# Altium PCB picr22-team-GibiBot-mainboard.PcbDoc
Units mm, origin at the board's own origin, x right, y up, seen from the top; angles counter-clockwise.
Board outline 50 x 48 mm, 4 copper layers (Top Layer, Layer 1, Layer 2, Bottom Layer), stack 0.603 mm thick; 65 components, 54 nets, 276 pads, 131 vias.
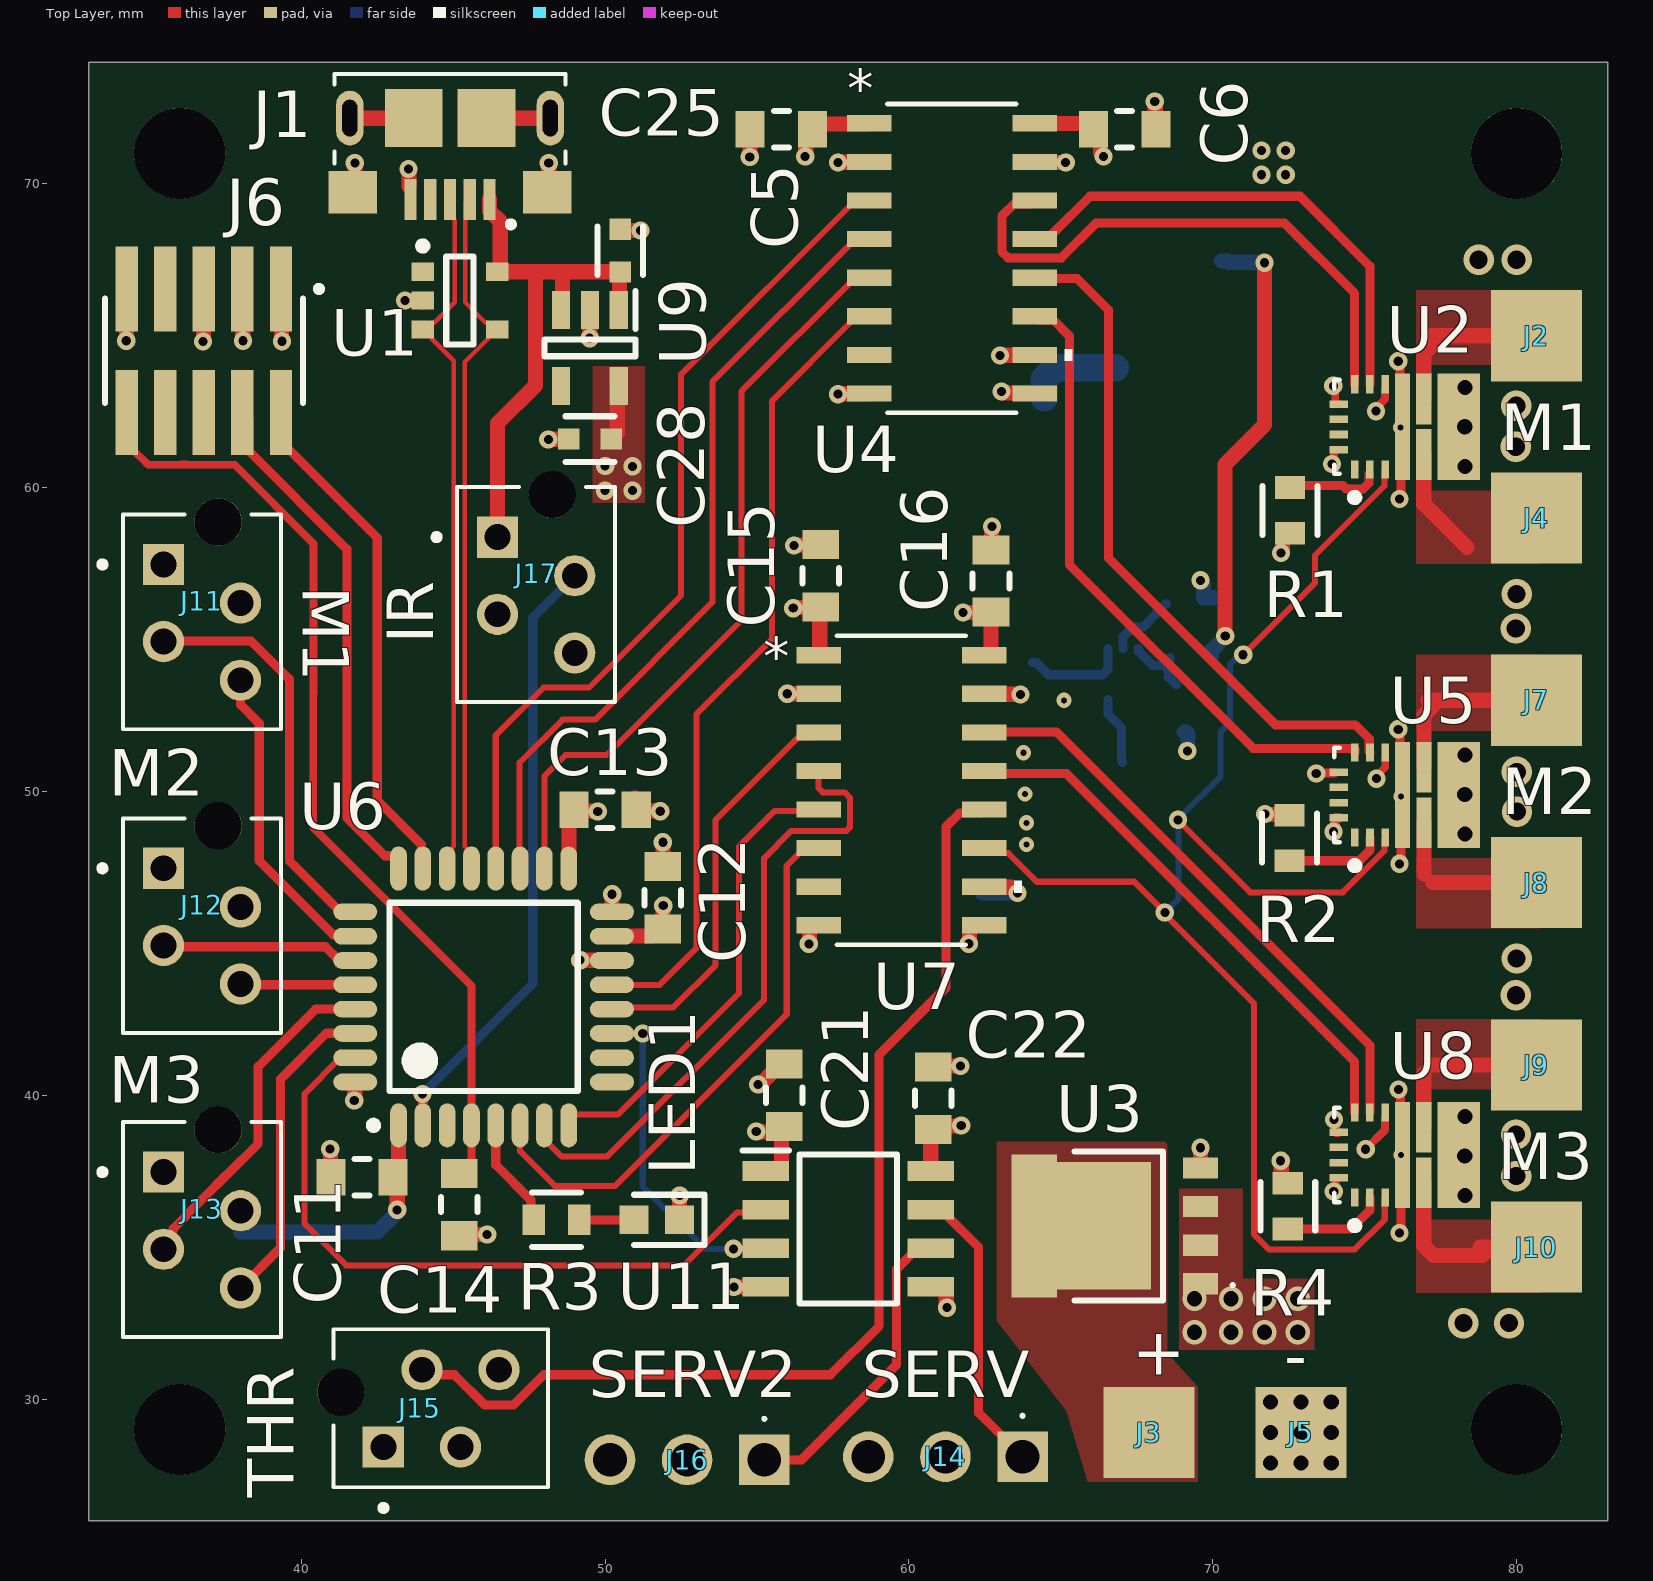
[diagram p0: Top Layer view]
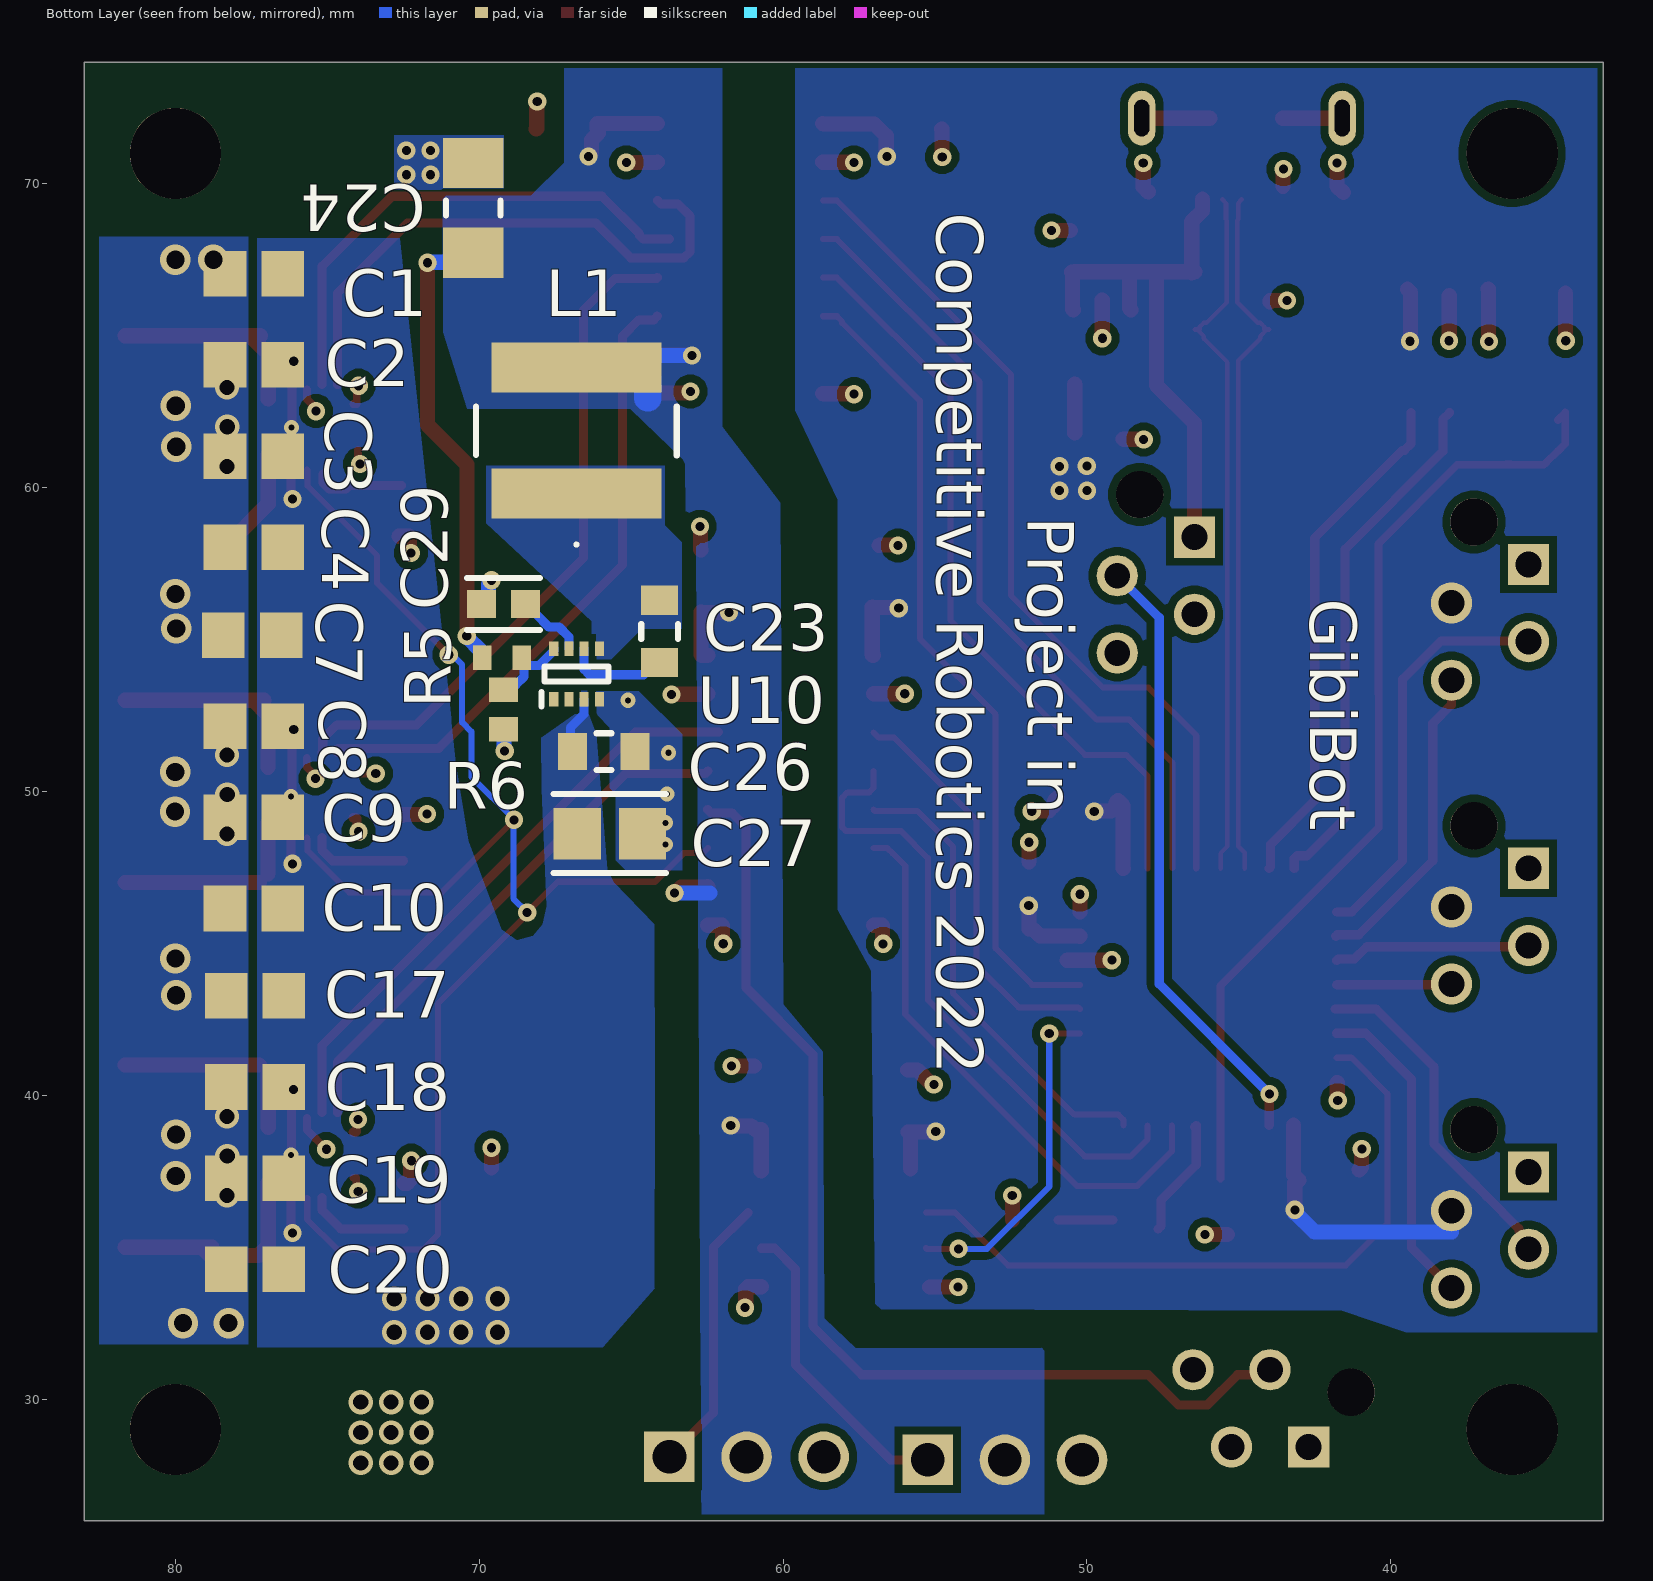
[diagram p1: Bottom Layer view, seen from below]
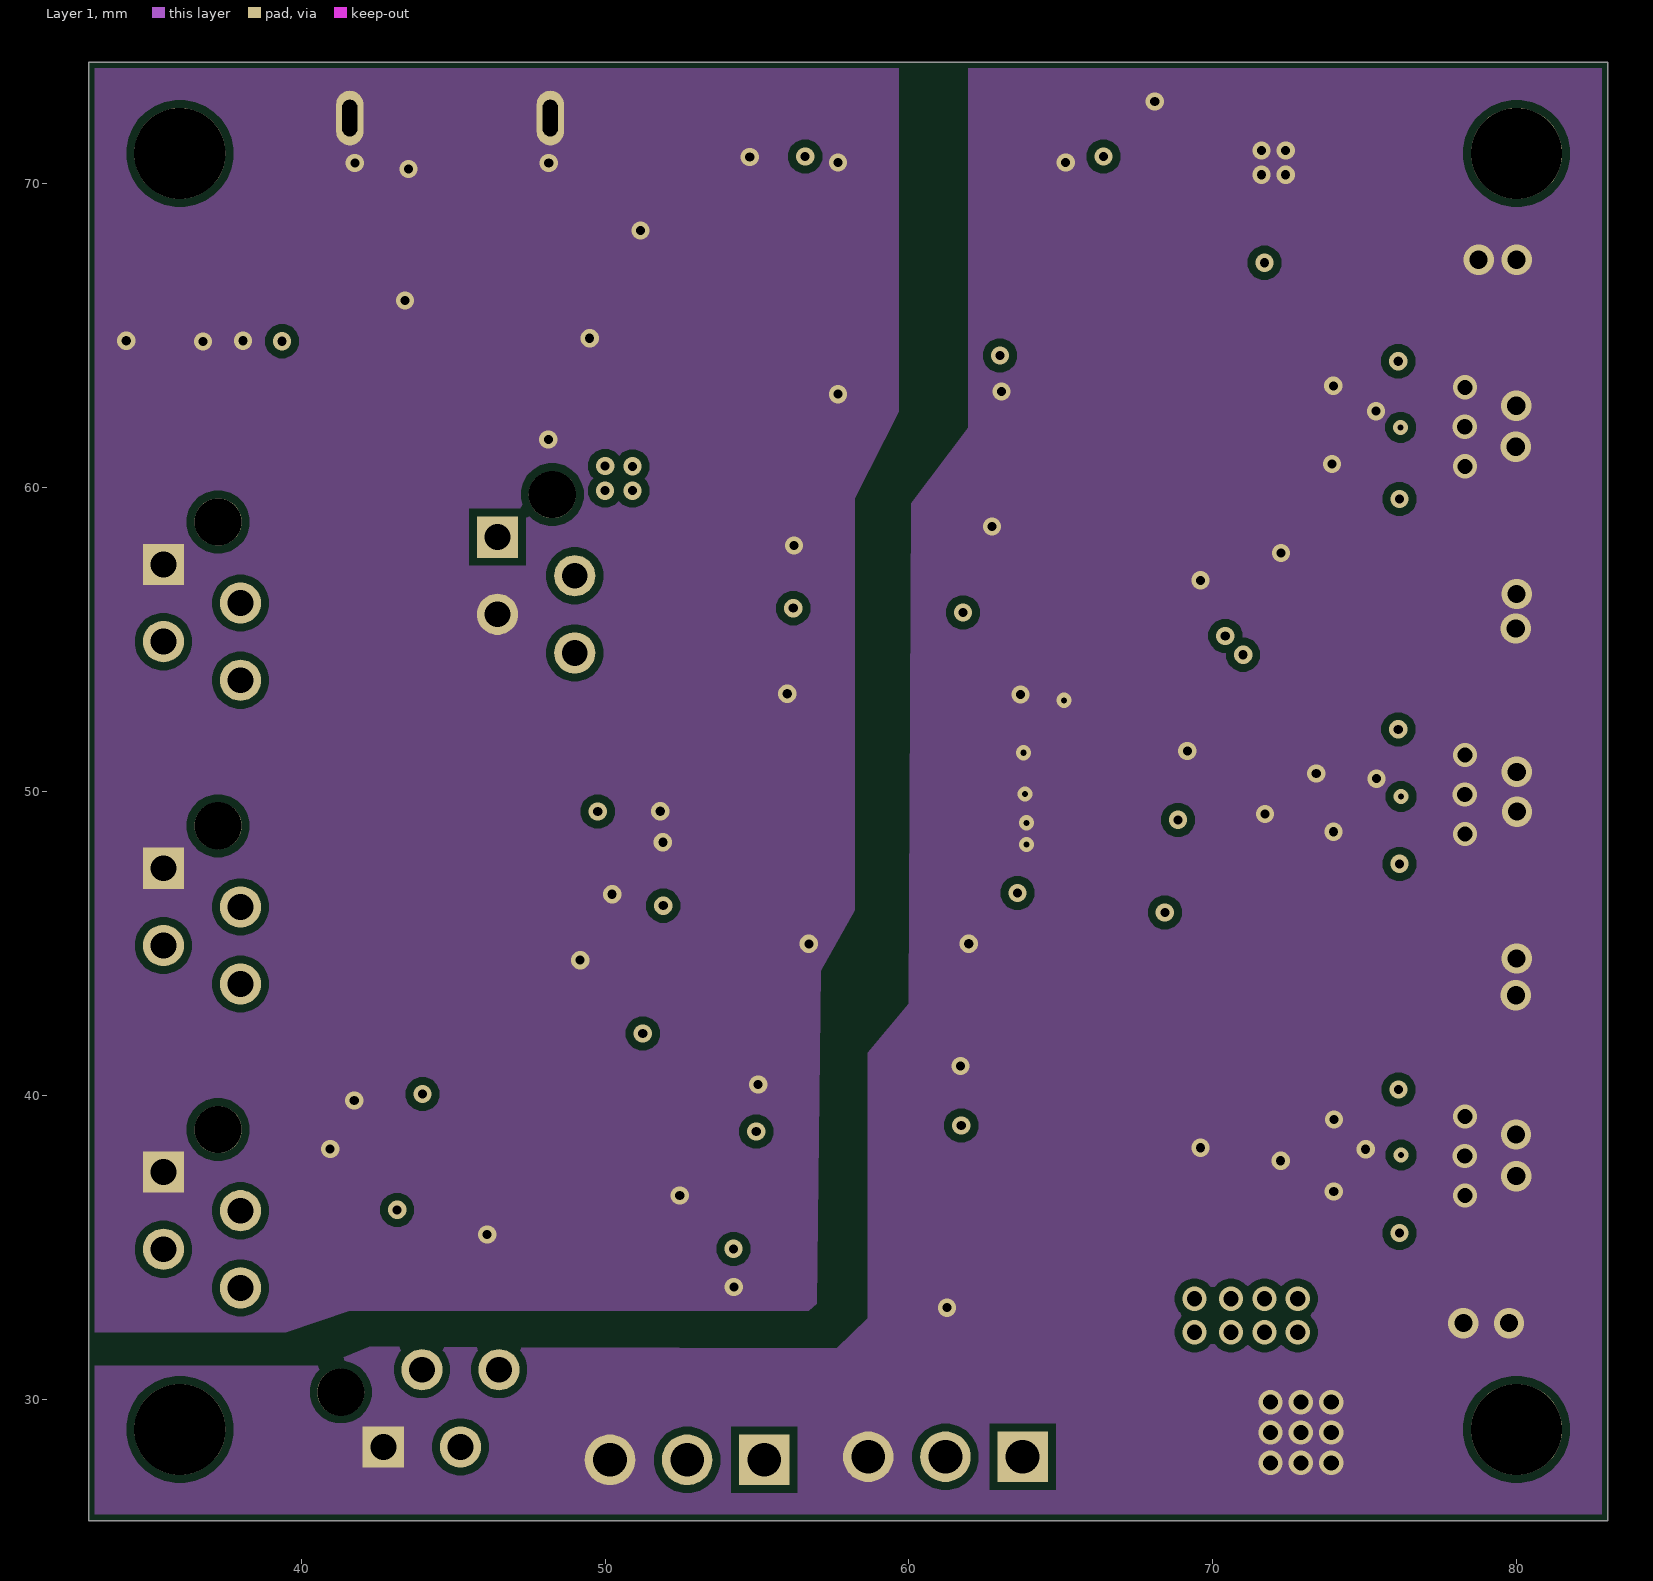
[diagram p2: Layer 1]
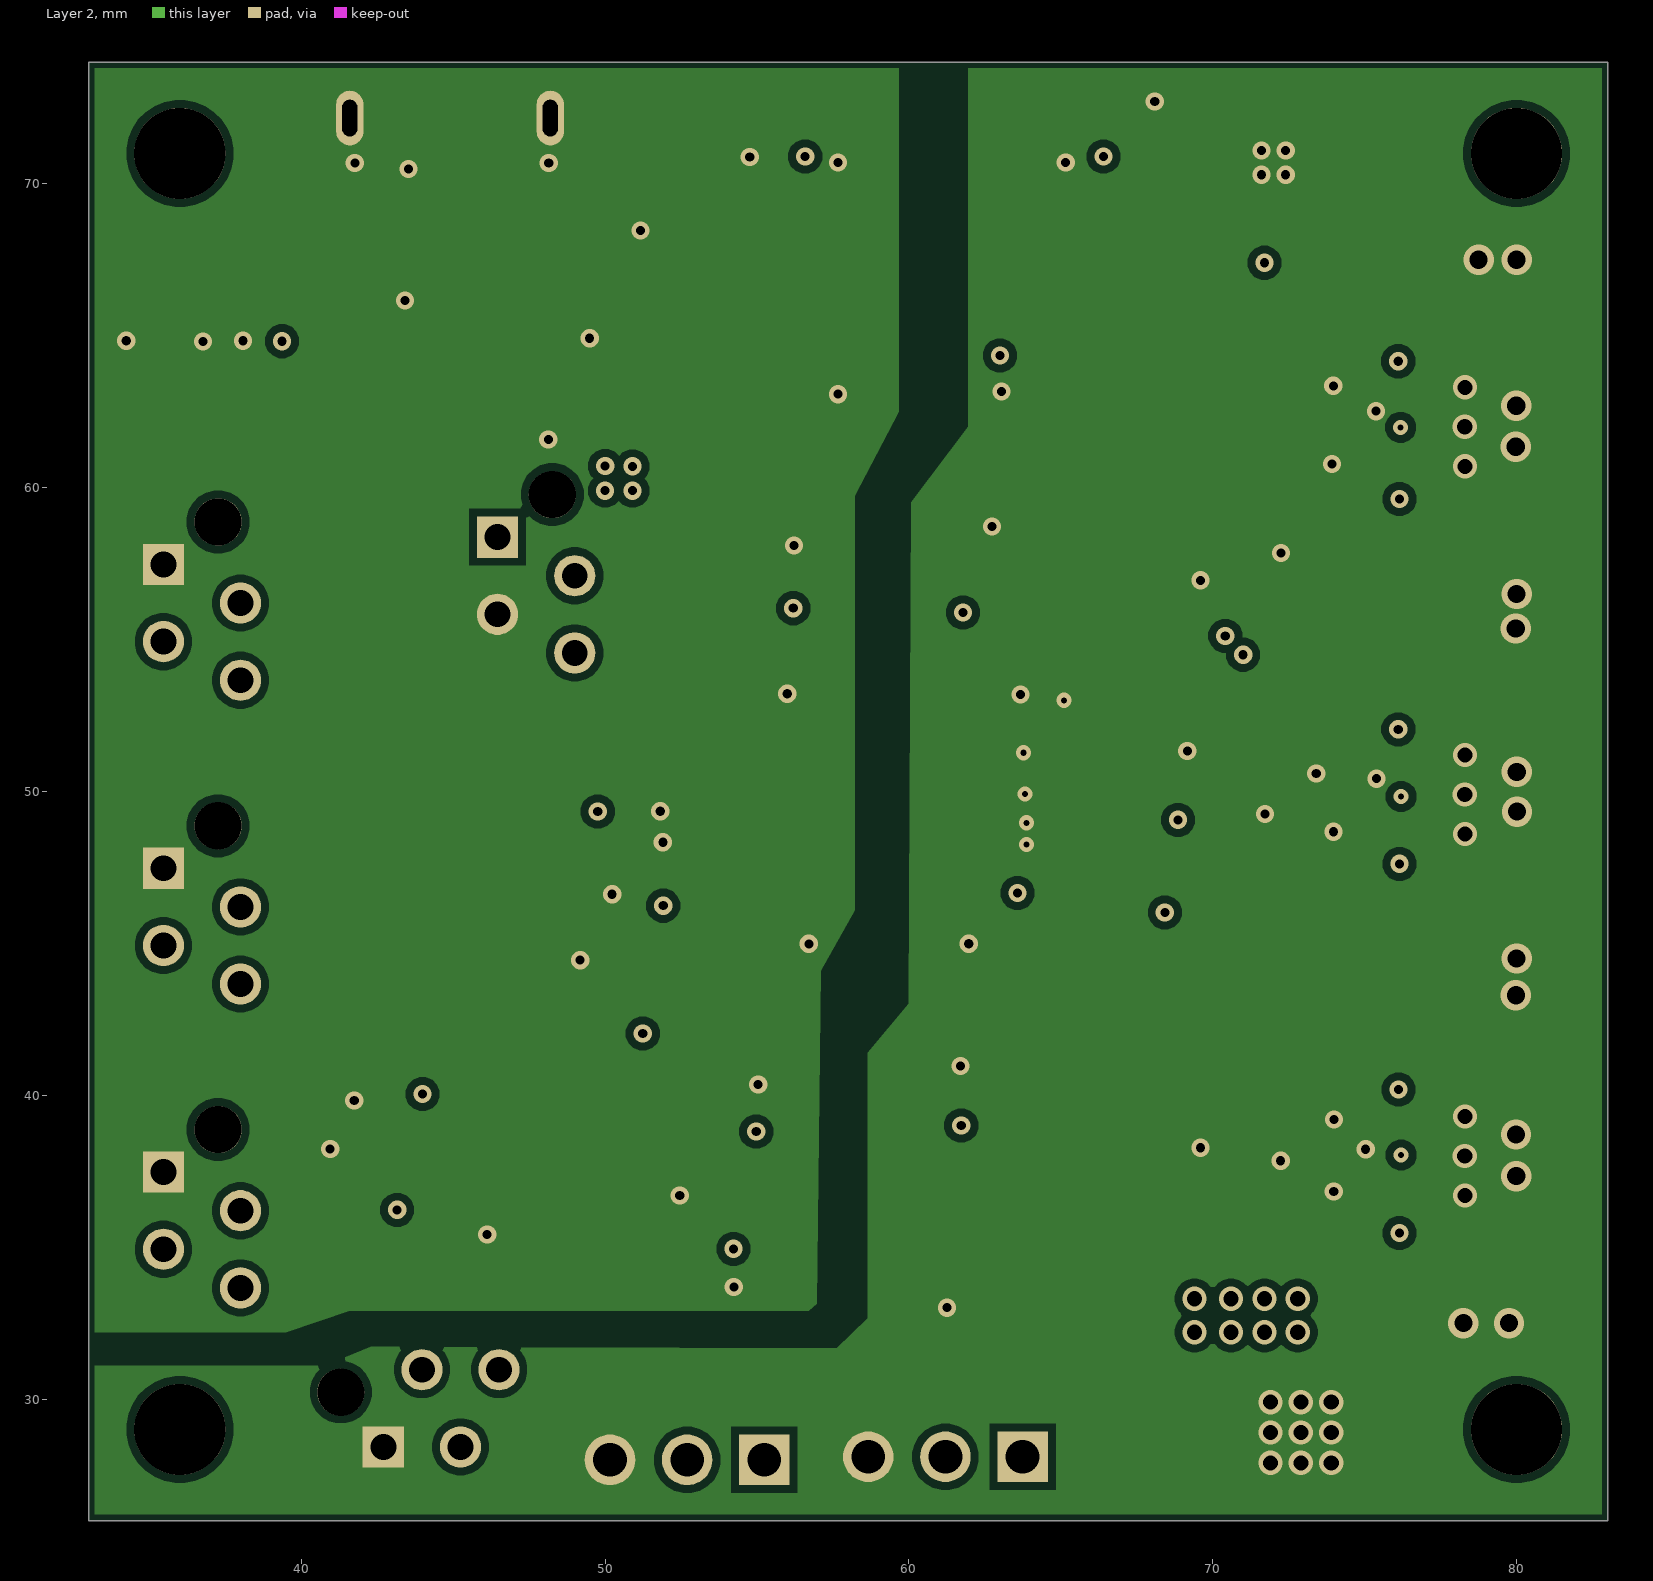
[diagram p3: Layer 2]
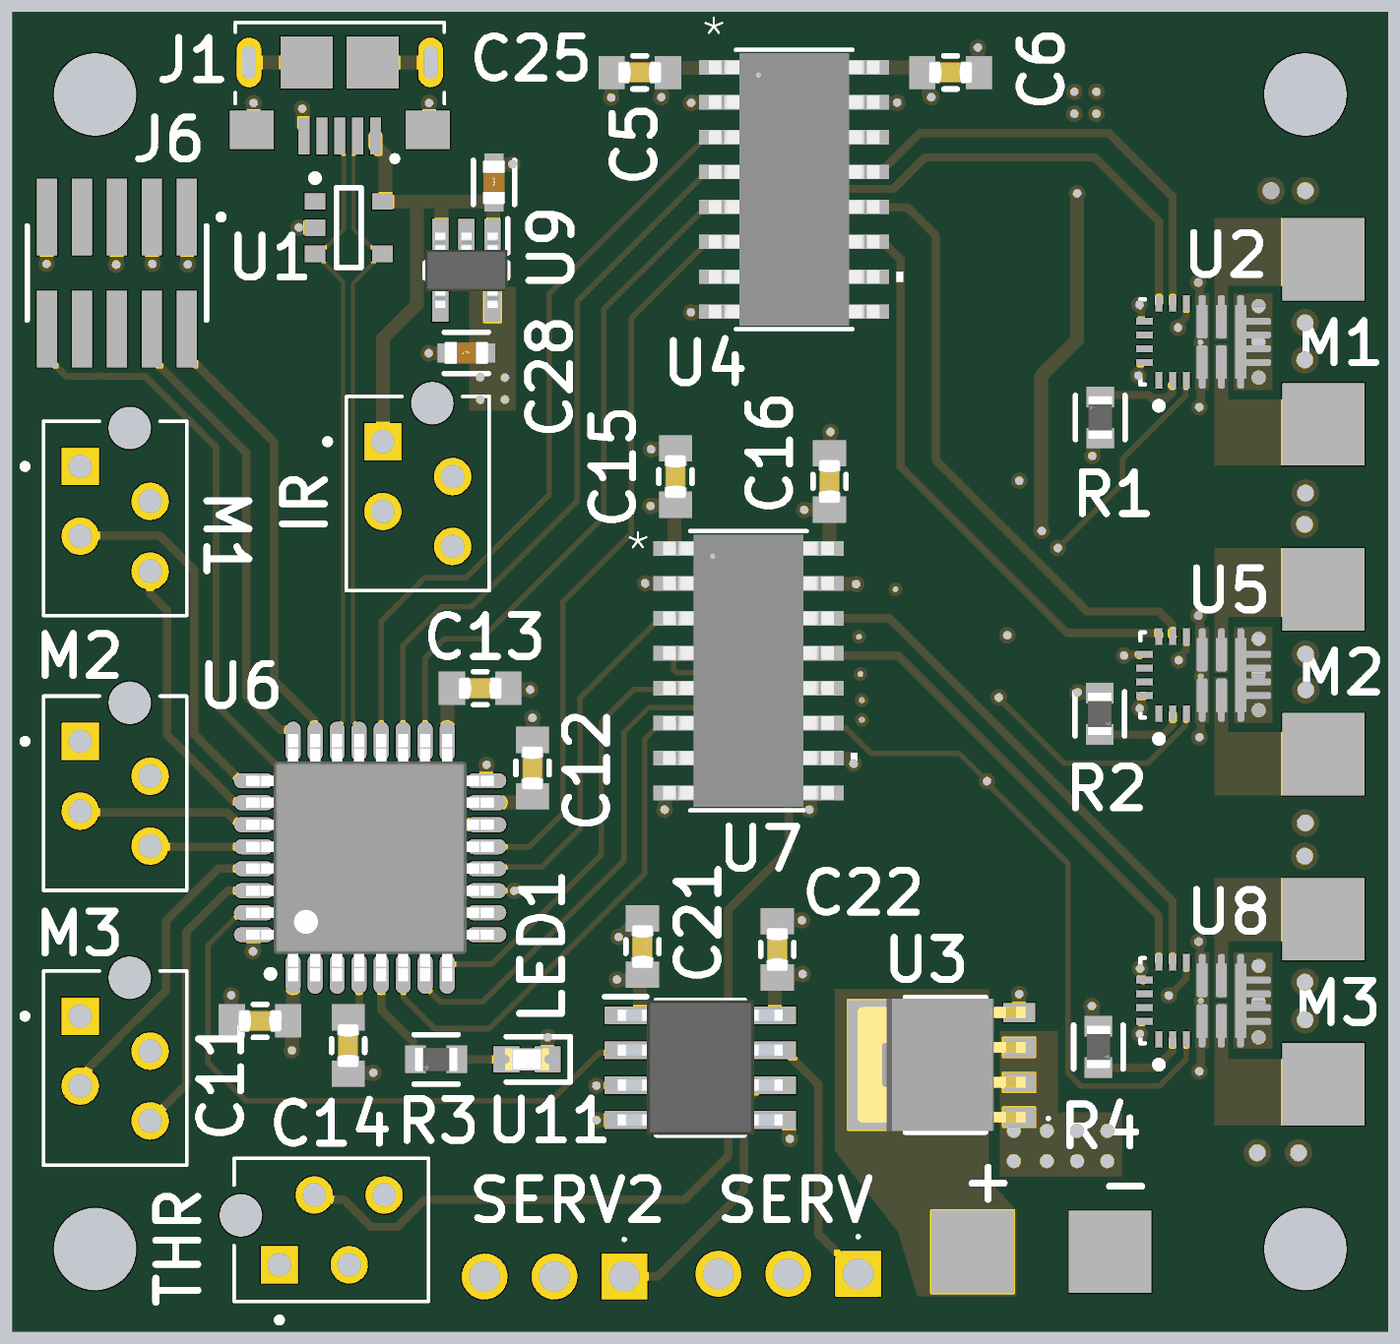
[diagram p4: 3D render of the assembled board from above, using the file's embedded part models]

## Layer stack, top to bottom
Top Solder: solder mask 0.0102, Solder Resist, Dk 3.5
Top Layer: signal copper 0.0356
Dielectric 2: prepreg 0.0711, PP-006, Dk 4.1
Layer 1: signal copper 0.035
Dielectric 1: dielectric 0.32, FR-4, Dk 4.8
Layer 2: signal copper 0.035
Dielectric 3: prepreg 0.0711, PP-006, Dk 4.1
Bottom Layer: signal copper 0.0356
Bottom Solder: solder mask 0.0102, Solder Resist, Dk 3.5

## Board outline
33,26 83,26 83,74 33,74

## Design rules (kind name [scope] priority, off if disabled: settings)
BoardOutlineClearance [All] p1: gap=0.2 ignorepadtopadclearanceinfootprint=FALSE except(0: Arc-SplitContinuation Track-SplitContinuation SMDPad-SplitContinuation THPad-SplitContinuation Via-SplitContinuation Fill-SplitContinuation Poly-SplitContinuation Region-SplitContinuation Text-SplitContinuation)
Clearance [All] p1: gap=0.254 ignorepadtopadclearanceinfootprint=TRUE except(0: Arc-Hole Track-Hole SMDPad-Hole THPad-Hole Via-Hole Fill-Hole Poly-Hole Region-Hole Text-Hole; 0.1: Arc-Arc Arc-Track Track-Track; 0.127: SMDPad-SMDPad; 0.2: Arc-SMDPad Track-SMDPad; 0.33: Arc-THPad Track-THPad)
DiffPairsRouting DiffPairsRoutingUSB [InDifferentialPairClass('USB')] p1: maxlimit=0.2 minlimit=0.2 mostfreqgap=0.2 toplayer_minwidth=0.15 toplayer_maxwidth=0.15 toplayer_prefwidth=0.15 midlayer1_minwidth=0.15 midlayer1_maxwidth=0.15 midlayer1_prefwidth=0.15 midlayer2_minwidth=0.15 midlayer2_maxwidth=0.15 midlayer2_prefwidth=0.15 bottomlayer_minwidth=0.15 bottomlayer_maxwidth=0.15 bottomlayer_prefwidth=0.15 maxuncoupledlength=12.7
HoleSize [All] p1: absolutevalues=TRUE maxlimit=6.3 minlimit=0.2 maxpercent=80.000 minpercent=20.000
HoleToHoleClearance [All] p1: gap=0.5 allowstackedmicrovias=TRUE
MinimumSolderMaskSliver [All] p1: minsoldermaskwidth=0.1
PolygonConnect [All] p1: connectstyle=Direct reliefconductorwidth=0.254 reliefentries=4 polygonreliefangle="90 Angle" airgapwidth=0.254
RoomDefinition picr22-team-GibiBot-mainboard [InComponentClass('picr22-team-GibiBot-mainboard')] p1: confinementstyle=ConfineIn formatcopy=TRUE lockcomponents=FALSE outline 32.1,24.8 84.4,24.8 84.4,75.3 32.1,75.3
RoutingVias [All] p1: holewidth=0.711 width=1.27 viastyle="Through Hole" minholewidth=0.2 minwidth=0.45 maxholewidth=0.711 maxwidth=1.27
SilkToSolderMaskClearance [IsPad] p1: minsilkscreentomaskgap=0.15 clearancetoexposedcopper=TRUE
SolderMaskExpansion [All] p1: expansion=0.05 istentingtop=FALSE
Width [All] p1: maxlimit=0.9 minlimit=0.15 preferedwidth=0.3
25 further rules are at their usual default settings.

## Classes and differential pairs
differential pair class USB: USB_D
differential pair USB_D: +USB_D_P -USB_D_N

## Components (designator, comment, footprint, x,y, rotation, side; value= is the part's Value field where it differs from the comment)
C1 "GRM21BR61A106KE19L" MURA-0805_H_1.35_M 77.419,67.038 r180 bottom
C2 "GRM21BR61A106KE19L" MURA-0805_H_1.35_M 77.419,64.038 r180 bottom
C3 "GRM21BR61A106KE19L" MURA-0805_H_1.35_M 77.419,61.038 r180 bottom
C4 "GRM21BR61A106KE19L" MURA-0805_H_1.35_M 77.419,58.038 r180 bottom
C5 "CGA3E2X7R1H104K080AA" FP-CGA3E-0_3-0_1-IPC_A 55.8,71.8 r180 top
C6 "CGA3E2X7R1H104K080AA" FP-CGA3E-0_3-0_1-IPC_A 67.1,71.8 r0 top
C7 "GRM21BR61A106KE19L" MURA-0805_H_1.35_M 77.469,55.147 r180 bottom
C8 "GRM21BR61A106KE19L" MURA-0805_H_1.35_M 77.419,52.147 r180 bottom
C9 "GRM21BR61A106KE19L" MURA-0805_H_1.35_M 77.419,49.147 r180 bottom
C10 "GRM21BR61A106KE19L" MURA-0805_H_1.35_M 77.419,46.147 r180 bottom
C11 "CGA3E2X7R1H104K080AA" FP-CGA3E-0_3-0_1-IPC_A 42,37.3 r0 top
C12 "CGA3E2X7R1H104K080AA" FP-CGA3E-0_3-0_1-IPC_A 51.9,46.5 r270 top
C13 "CGA3E2X7R1H104K080AA" FP-CGA3E-0_3-0_1-IPC_A 50,49.4 r180 top
C14 "CGA3E2X7R1H104K080AA" FP-CGA3E-0_3-0_1-IPC_A 45.2,36.4 r270 top
C15 "CGA3E2X7R1H104K080AA" FP-CGA3E-0_3-0_1-IPC_A 57.1,57.1 r90 top
C16 "CGA3E2X7R1H104K080AA" FP-CGA3E-0_3-0_1-IPC_A 62.7,56.925 r90 top
C17 "GRM21BR61A106KE19L" MURA-0805_H_1.35_M 77.385,43.271 r180 bottom
C18 "GRM21BR61A106KE19L" MURA-0805_H_1.35_M 77.385,40.271 r180 bottom
C19 "GRM21BR61A106KE19L" MURA-0805_H_1.35_M 77.385,37.271 r180 bottom
C20 "GRM21BR61A106KE19L" MURA-0805_H_1.35_M 77.385,34.271 r180 bottom
C21 "CGA3E2X7R1H104K080AA" FP-CGA3E-0_3-0_1-IPC_A 55.9,40 r270 top
C22 "CGA3E2X7R1H104K080AA" FP-CGA3E-0_3-0_1-IPC_A 60.8,39.9 r90 top
C23 "CGA3E2X7R1H104K080AA" FP-CGA3E-0_3-0_1-IPC_A 64.065,55.268 r270 bottom
C24 "GRM31CR60J107ME39L" CAPC3216X190X55ML30T25 70.2,69.205 r270 bottom
C25 "C1608X5R1C105K080AA" FP-C1608-080-0_1-MFG 50.5,67.8 r270 top
C26 "CGA3E2X7R1H104K080AA" FP-CGA3E-0_3-0_1-IPC_A 65.9,51.312 r180 bottom
C27 "C3216X7R1V106M160AC" FP-C3216-160-0_2-IPC_C 65.7,48.609 r180 bottom
C28 "C1608X5R1C105K080AA" FP-C1608-080-0_1-MFG 49.5,61.6 r0 top
C29 "CL10B333KB8NNNC" FP-CL10-IPC_B 69.2,56.172 r0 bottom
J1 "10118193-0001LF" FCI_10118193-0001LF 44.896,72.165 r180 top
J2 "M1_OUT1" "Power pad"#1 80.656,65 r90 top
J3 "BAT+" "Power pad"#2 66.9,28.9 r180 top locked
J4 "M1_OUT2" "Power pad"#1 80.656,59 r90 top
J5 "BAT-" "Power pad"#2 71.9,28.9 r180 top
J6 "FTSH-105-XX-X-DV" SAMTEC_FTSH-105-XX-X-DV 36.791,64.505 r180 top
J7 "M2_OUT1" "Power pad"#1 80.656,53 r90 top
J8 "M2_OUT2" "Power pad"#1 80.656,47 r90 top
J9 "M3_OUT1" "Power pad"#1 80.656,41 r90 top
J10 "M3_OUT2" "Power pad"#1 80.656,35 r90 top
J11 "215079-4" TE_215079-4 35.46,57.47 r90 top
J12 "215079-4" TE_215079-4 35.46,47.47 r90 top
J13 "215079-4" TE_215079-4 35.46,37.47 r90 top
J14 "SERVO" SERVO 63.74,28.1 r180 top
J15 "215079-4" TE_215079-4 42.7,28.426 r180 top
J16 "SERVO" SERVO 55.24,28 r180 top
J17 "215079-4" TE_215079-4 46.46,58.37 r90 top
L1 "SRP6060FA-5R6M" SRP6060FA5R6M 66.8,61.876 r0 bottom
LED1 "150060SS75000" LEDC1608X80N 51.699,35.9 r180 top
R1 "CRCW06031M00FKEA" FP-CRCW0603-e3-MFG 72.542,59.25 r90 top
R2 "CRCW06031M00FKEA" FP-CRCW0603-e3-MFG 72.525,48.468 r270 top
R3 "CRCW06031M00FKEA" FP-CRCW0603-e3-MFG 48.399,35.9 r180 top
R4 "CRCW06031M00FKEA" FP-CRCW0603-e3-MFG 72.474,36.351 r270 top
R5 "RC0603FR-0752K3L" RESC1608X55X25LL10T15 69.248,54.4 r0 bottom
R6 "CRCW060310K0FKEA" RESC1609X50X30NL8T20 69.2,52.7 r90 bottom
U1 "CM1223-02SO" ONSC-SOT23-5-527AH-01_L 45.221,66.155 r0 top
U2 "PDRV8243HRXYQ1" RXY0014A-MFG 76.297,62 r90 top
U3 "BUK6Y24-40PX" BUK6Y2440PX 66.857,35.7 r90 top
U4 "MAX14930AASE+" 21-0041_S16+1_MXM 61.416,67.545 r0 top
U5 "PDRV8243HRXYQ1" RXY0014A-MFG 76.3,49.883 r90 top
U6 "STM32G441KBT" STM32G441KB 46,43.235 r90 top
U7 "MAX14930AASE+" 21-0041_S16+1_MXM 59.752,50.039 r0 top
U8 "PDRV8243HRXYQ1" RXY0014A-MFG 76.297,38.033 r90 top
U9 "NCP164CSN330T1G" SOT95P275X110-5N 49.5,64.6 r270 top
U10 "TPS62933DRLR" SOTFL50P160X60-8N 66.798,53.866 r90 bottom
U11 "MAX12930EASA+" SOIC127P600X175-8N 58.003,35.6 r0 top

## Footprints (in the part's own frame and the unit in brackets; to place one, negate y for a bottom-side part, rotate by r counter-clockwise, add the part's x,y. Pads: shape width x height; smd on the part's side, far side on the other; paste and mask are expansions set on the pad)
21-0041_S16+1_MXM [mil]
  rect 57.55x21 smd paste+0 mask+0: 1(-107.27,175) 2(-107.27,125) 3(-107.27,75) 4(-107.27,25) 5(-107.27,-25) 6(-107.27,-75) 7(-107.27,-125) 8(-107.27,-175) 9(107.27,-175) 10(107.27,-125) 11(107.27,-75) 12(107.27,-25) 13(107.27,25) 14(107.27,75) 15(107.27,125) 16(107.27,175)
  silkscreen extent -84,-200 156,200, body extent -122,-195 122,195, height 69
BUK6Y2440PX [mm]
  rect 0.7x1.15 smd: 1(-1.905,-2.737) 2(-0.635,-2.737) 3(0.635,-2.737) 4(1.905,-2.737)
  rect 4.7x1.5 smd: 5(0,2.738)
  rect 4.2x3.1 smd: 6(0,0.438)
  silkscreen extent -2.45,-3.85 2.45,1.4, body extent -2.4,-2.97 2.4,3.14, height 1
CAPC3216X190X55ML30T25 [mm] "Chip Capacitor, 2-Leads, Body 3.5x1.9mm, IPC Low Density"
  rect 1.65x2 smd: 1(-1.475,0) 2(1.475,0)
  silkscreen extent -0.25,-0.9 0.25,0.9, body extent -1.75,-0.95 1.75,0.95, height 1.9
FCI_10118193-0001LF [mm]
  rect 0.4x1.35 smd: 1(-1.3,2.675) 2(-0.65,2.675) 3(0,2.675) 4(0.65,2.675) 5(1.3,2.675)
  rect 1.6x1.4 smd: S1(-3.2,2.45) S2(3.2,2.45)
  rect 1.9x1.9 smd: S3(1.2,0) S4(-1.2,0)
  oval 0.9x1.8 hole 0.5 slot 1.2 at 90 deg: S5(-3.3,0) S6(3.3,0)
  silkscreen extent -3.8,-1.45 3.8,3.6
FP-C1608-080-0_1-MFG [mm]
  rect 0.7x0.7 smd paste+0 mask+0: 1(-0.7,0) 2(0.7,0)
  silkscreen extent -0.8,-0.75 0.8,0.75, body extent -1.15,-0.55 1.15,0.55, height 0.25
FP-C3216-160-0_2-IPC_C [mm]
  rect 1.554x1.706 smd paste+0 mask+0: 1(-1.076,0) 2(1.076,0)
  silkscreen extent -1.85,-1.3 1.85,1.3, body extent -1.6,-0.8 1.6,0.8, height 1.8
FP-CGA3E-0_3-0_1-IPC_A [mm]
  rect 0.956x1.206 smd paste+0 mask+0: 1(-1.025,0) 2(1.025,0)
  silkscreen extent -0.25,-0.6 0.25,0.6, body extent -2,-1.1 2,1.1, height 0.25
FP-CL10-IPC_B [mm]
  rect 0.958x0.912 smd paste+0 mask+0: 1(-0.727,0) 2(0.727,0)
  silkscreen extent -1.21,-0.86 1.21,0.86, body extent -0.8,-0.4 0.8,0.4, height 0.9
FP-CRCW0603-e3-MFG [mm]
  rect 0.75x1 smd paste+0 mask+0: 1(-0.75,0) 2(0.75,0)
  silkscreen extent -0.8,-0.9 0.8,0.9, body extent -1.22,-0.6 1.22,0.6, height 0.25
LEDC1608X80N [mm]
  rect 0.95x0.95 smd: 1(-0.75,0) 2(0.75,0)
  silkscreen extent -1.57,-0.82 0.75,0.82, body extent -0.8,-0.4 0.8,0.4, height 0.7
MURA-0805_H_1.35_M [mm] "SMD, 2-Leads, Body 2.1x1.35mm, IPC Low Density"
  rect 1.4x1.5 smd: 1(-0.95,0) 2(0.95,0)
  body extent -1.05,-0.67 1.05,0.67, height 1.35
ONSC-SOT23-5-527AH-01_L [mm] "SOT23, 5-Leads, Body 2.9x1.6mm, Pitch 0.95mm, IPC High Density"
  rect 0.75x0.6 smd: 1(-1.225,0.95) 2(-1.225,0) 3(-1.225,-0.95) 4(1.225,-0.95) 5(1.225,0.95)
  silkscreen extent -1.35,-1.45 0.45,1.92, body extent -0.8,-1.45 0.8,1.45, height 1.45
"Power pad"#1 [mm]
  rect 3x3 smd: 2(0,0)
"Power pad"#2 [mm]
  rect 3x3 smd: 2(-1,0)
RESC1608X55X25LL10T15 [mm] "Chip Resistor, 2-Leads, Body 1.60x0.80mm, IPC High Density"
  rect 0.6x0.8 smd: 1(-0.65,0) 2(0.65,0)
  body extent -0.85,-0.45 0.85,0.45, height 0.55
RESC1609X50X30NL8T20 [mm] "Chip Resistor, 2-Leads, Body 1.65x0.95mm, IPC Medium Density"
  rect 0.8x0.95 smd: 1(-0.65,0) 2(0.65,0)
  body extent -0.82,-0.48 0.82,0.48, height 0.5
RXY0014A-MFG [mm]
  rect 0.6x0.25 smd paste+0 mask-0.292: 1(-1.4,1.625) 2(-1.4,1.125) 3(-1.4,0.625) 8(1.4,0.625) 9(1.4,1.125) 10(1.4,1.625)
  rect 3.5x0.5 smd paste-1.737 mask-1.74: 4(0,0.05)
  rect 1.675x0.5 smd paste-0.825 mask-0.826: 5(-0.912,-0.65) 7(0.912,-0.65)
  rect 3.5x1.4 smd paste-1.737 mask-1.74: 6(0,-1.8)
  rect 0.25x0.6 smd paste+0 mask-0.292: 11(0.75,2.15) 12(0.25,2.15) 13(-0.25,2.15) 14(-0.75,2.15)
  silkscreen extent -2.45,1.5 1.55,2.3, body extent 0,0 0.25,0.25, height 0.25
SAMTEC_FTSH-105-XX-X-DV [mm]
  rect 0.74x2.79 smd: 01(-2.54,-2.035) 02(-2.54,2.035) 03(-1.27,-2.035) 04(-1.27,2.035) 05(0,-2.035) 06(0,2.035) 07(1.27,-2.035) 08(1.27,2.035) 09(2.54,-2.035) 10(2.54,2.035)
  silkscreen extent -3.89,-2.13 3.26,1.72
SERVO [mm]
  rect 1.665x1.665 hole 1.11: 1(0,0)
  round 1.665 hole 1.11: 2(2.54,0) 3(5.08,0)
  silkscreen extent -0.05,-1.4 0.05,-1.3
SOIC127P600X175-8N [mm]
  rect 1.525x0.65 smd: 1(-2.712,1.905) 2(-2.712,0.635) 3(-2.712,-0.635) 4(-2.712,-1.905) 5(2.712,-1.905) 6(2.712,-0.635) 7(2.712,0.635) 8(2.712,1.905)
  silkscreen extent -3.47,-2.45 1.6,2.58, body extent -3,-2.45 3,2.45, height 1.75
SOT95P275X110-5N [mm]
  rect 1.25x0.6 smd: 1(-1.25,0.95) 2(-1.25,0) 3(-1.25,-0.95) 4(1.25,-0.95) 5(1.25,0.95)
  silkscreen extent -1.88,-1.5 0.27,1.5, body extent -1.38,-1.5 1.38,1.5, height 1.1
SOTFL50P160X60-8N [mm]
  rect 0.475x0.3 smd: 1(-0.838,0.75) 2(-0.838,0.25) 3(-0.838,-0.25) 4(-0.838,-0.75) 5(0.838,-0.75) 6(0.838,-0.25) 7(0.838,0.25) 8(0.838,0.75)
  silkscreen extent -1.07,-1.05 0.25,1.15, body extent -0.8,-1.02 0.8,1.08, height 0.6
SRP6060FA5R6M [mm]
  rect 5.6x1.65 smd: 1(0,2.075) 2(0,-2.075)
  silkscreen extent -3.3,-0.8 3.3,3.8
STM32G441KB [mm] "TQFP, 32-Leads, Body 7,00x7,00mm, Pitch 0,80mm, IPC Medium Density"
  oval 1.45x0.55 smd: 1(-4.225,2.8) 2(-4.225,2) 3(-4.225,1.2) 4(-4.225,0.4) 5(-4.225,-0.4) 6(-4.225,-1.2) 7(-4.225,-2) 8(-4.225,-2.8) 17(4.225,-2.8) 18(4.225,-2) 19(4.225,-1.2) 20(4.225,-0.4) 21(4.225,0.4) 22(4.225,1.2) 23(4.225,2) 24(4.225,2.8)
  oval 0.55x1.45 smd: 9(-2.8,-4.225) 11(-1.2,-4.225) 12(-0.4,-4.225) 13(0.4,-4.225) 14(1.2,-4.225) 15(2,-4.225) 16(2.8,-4.225) 25(2.8,4.225) 26(2,4.225) 27(1.2,4.225) 28(0.4,4.225) 29(-0.4,4.225) 30(-1.2,4.225) 31(-2,4.225) 32(-2.8,4.225) ""(-2,-4.225)
  silkscreen extent -4.35,-3.1 3.1,3.75, body extent -4.5,-4.5 4.5,4.5, height 1.6
TE_215079-4 [mm]
  rect 1.358x1.358 hole 0.85: 1(0,0)
  round 1.358 hole 0.85: 2(-1.27,-2.54) 3(-2.54,0) 4(-3.81,-2.54)
  round 1.55 hole 1.55 unplated: ""(1.4,-1.8)
  silkscreen extent -5.43,-3.87 1.65,2.11

## Part data
C1 C2 C3 C4 C7 C8 C9 C10 C17 C18 C19 C20: library part CMP-2000-05254-1, "CAP, Ceramic, 10 uF, 10%, 10 V, 0805, RoHS, Tape and Reel", Capacitance=10µF, Manufacturer=Murata, Operating Temperature=-55degC~85degC, Package / Case=0805(2012Metric), Package Description="2-Pin Surface Mount Device (0805), Body 2.1 x 1.35 mm", Package Reference=805, Ratings=-, Standard Package=1, Temperature Coefficient=X5R, Tolerance=±10%, Voltage - Rated=10V, Applications=GeneralPurpose, Catalog Drawings=GRMSeries_0805_1.25, Category=Capacitors, Datasheet URL=https://datasheet.ciiva.com/3777/210grm21br61a106ke1923-3777175.pdf, Datasheet Version=Aug-14, Family=CeramicCapacitors, Featured Product=GA3SafetyRecognizedCapsandHi-CapMLCC, Features=-, Height - Seated (Max)=-, Lead Spacing=-, Lead Style=-, Manufacturer URL=http://www.murata.com/, Mounting Type=SurfaceMount,MLCC, Online Catalog=GRMSeries, Other Names=490-1709-6, Packaging=Digi-Reel, Product Training Modules=High-CapMultilayerCeramicCapacitors, Series=GRM, Size / Dimension="0.079\"Lx0.049\"W(2.00mmx1.25mm)", Thickness (Max)="0.053\"(1.35mm)"
C5 C6 C11 C12 C13 C14 C15 C16 C21 C22 C23 C26: library part CMP-2000-07546-2, "Cap Ceramic 100nF 50V X7R 10% Pad SMD 0603 +125°C Automotive T/R", Capacitance=100nF, Case Code (Imperial)=0603, Case Code (Metric)=1608, Dielectric=X7R, Max Operating Temperature=125°C, Min Operating Temperature=-55°C, Package Quantity=1, Ratings=AEC-Q200, Tolerance=10%, Voltage=50V, Case/Package=0603, Composition=Ceramic, Depth=0.8mm, Height=0.8mm, Lead Free="Lead Free", Length=1.6mm, Mount="Surface Mount", Packaging="Tape and Reel", Radiation Hardening=No, REACH SVHC="No SVHC", Termination=SMD/SMT, Thickness=0.035inch, Voltage Rating=50V, Voltage Rating (DC)=50V, Weight=7.1E-05oz, Width=0.8mm
C24: library part CMP-1662-00011-2, "Chip Capacitor, 100 uF, +/- 20%, 6.3 V, -55 to 85 degC, 1206 (3216 Metric), RoHS, Tape and Reel", Capacitance="100 uF", Case Code (Imperial)=1206, Case Code (Metric)=3216, Max Operating Temperature="85 degC", Min Operating Temperature="-55 degC", Package Quantity=2000, Tolerance=20%, Type (Capacitors)=X5R, Voltage Rating="6.3 V", Case\/Package=1206, ComponentLink1Description="Manufacturer URL", ComponentLink1URL=http://www.murata.com/, ComponentLink2Description=Datasheet, ComponentLink2URL=http://psearch.en.murata.com/capacitor/product/GRM31CR60J107ME39%23.pdf, DatasheetVersion=09/2016, Height="1.6 mm", Length="3.2 mm", Mount="Surface Mount", Mounting Technology="Surface Mount", PackageDescription="2-Pin Surface Mount Device, Body 3.2 x 1.6 mm", PackageReference=1206, Packaging="Tape and Reel", PartNumber=GRM31CR60J107ME39L, Pins=2, Radiation Hardening=No, REACH SVHC="No SVHC", RoHSCompliant=true, Voltage Rating (DC)="6.3 V", Width="1.6 mm"
C25 C28: library part CMP-08246-006723-1, "Multilayer Ceramic Capacitors 1μF ±10% 16V X5R SMD 0603", Capacitance=1uF, Case Code (Imperial)=0603, Case Code (Metric)=1608, Dielectric=X5R, Dielectric Material=Ceramic, Max Operating Temperature=85°C, Min Operating Temperature=-55°C, Package Quantity=1, Tolerance=10%, Voltage=16V, Case/Package=0603, Construction=Flat, Contact Plating=Tin, Depth=0.8mm, Height=0.8mm, Lead Free="Lead Free", Length=1.6mm, Mount="Surface Mount", Number of Pins=2, Packaging="Tape and Reel", Radiation Hardening=No, REACH SVHC="No SVHC", Resistor Type=Ceramic, RoHS Compliant=Yes, Series=C, Termination=SMD/SMT, Thickness=0.037inch, Voltage Rating=16V, Voltage Rating (DC)=16V, Weight=7.1E-05oz, Width=0.031inch
C27: library part CMP-2000-06048-2, "Multilayer Ceramic Capacitors 10uF ±20% 35V X7R SMD 1206", Capacitance=10uF, Case Code (Imperial)=1206, Case Code (Metric)=3216, Dielectric=X7R, Dielectric Material=Ceramic, Max Operating Temperature=125°C, Min Operating Temperature=-55°C, Package Quantity=2000, Tolerance=20%, Voltage Rating=35V, Case/Package=1206, Construction=Flat, Depth=1.6mm, Height=1.6mm, Lead Free="Lead Free", Length=3.2mm, Mount="Surface Mount", Packaging="Tape and Reel", REACH SVHC="No SVHC", Resistor Type=Ceramic, RoHS Compliant=Yes, Series=C, Termination=SMD/SMT, Thickness=0.071inch, Voltage Rating (DC)=35V, Weight=0.000571oz, Width=0.063inch
C29: library part CMP-13271-001282-1, "Cap Ceramic 33nF 50V X7R ±10% Pad SMD 0603 +125°C T/R", Capacitance=33nF, Case Code (Imperial)=0603, Case Code (Metric)=1608, Dielectric=X7R, Max Operating Temperature=125°C, Min Operating Temperature=-55°C, Package Quantity=1, Tolerance=10%, Voltage=50V, Case/Package=0603, Contact Plating=Tin, Depth=0.8mm, Height=0.8mm, Length=1.6mm, Material=Ceramic, Mount="Surface Mount", Packaging="Tape and Reel", Radiation Hardening=No, Thickness=0.035inch, Voltage Rating=50V, Width=0.031inch
J1: "USB - micro B USB 2.0 Receptacle Connector 5 Position Surface Mount, Right Angle; Through Hole", Package=None, Availability=Unavailable, MF="Amphenol ICC", MP=10118193-0001LF, Price=None, SnapEDA_Link=https://www.snapeda.com/parts/10118193-0001LF/Amphenol%20FCI/view-part/2758989/?ref=snap
J2 J3 J4 J5 J7 J8 J9 J10: library part "Power pad"
J6: "Connector Header Surface Mount 10 position 0.050\" (1.27mm)", Package=None, Availability=Unavailable, MP=FTSH-105-XX-X-DV, Price=None
J11 J12 J13 J15 J17: "4 Position Receptacle Connector Through Hole", Package="SMD-6 Omron Electronics", Availability=Unavailable, EU_RoHS_Compliance=Compliant, MF="TE Connectivity", MP=215079-4, Price=None, SnapEDA_Link=https://www.snapeda.com/parts/215079-4/TE%20Connectivity%20AMP%20Connectors/view-part/2366486/?ref=snap, TE_purchase_URL=https://www.te.com/usa-en/product-215079-4.html?te_bu=Cor&te_type=disp&te_campaign=seda_glo_cor-seda-global-disp-prtnr-fy19-seda-model-bom-cta_sma-317_1&elqCampaignId=32493
J14 J16: "Connector", Arrow Part Number=78208-103, Manufacturer_Name=Amphenol, Mouser Part Number=649-78208-103, Arrow Price/Stock=https://www.arrow.com/en/products/78208-103/amphenol-fci, Datasheet Link=https://cdn.amphenol-cs.com/media/wysiwyg/files/drawing/78208.pdf, Height=5.54mm, Mouser Price/Stock=https://www.mouser.co.uk/ProductDetail/Amphenol-FCI/78208-103?qs=aFaVeqgBj1H8lO9kIoPCww%3D%3D
L1: "BOURNS - SRP6060FA-5R6M - Power Inductor (SMD), 5.6 H, 10 A, Shielded, 10 A, SRP6060FA Series, 6.6mm x 6.4mm x 5.8mm", Manufacturer_Name=Bourns, Datasheet Link=https://www.bourns.com/docs/Product-Datasheets/SRP6060FA.pdf, Geometry.Height=6mm, Manufacturer_Part_Number=SRP6060FA-5R6M
LED1: "LED", Manufacturer_Name="Wurth Elektronik", Mouser Part Number=710-150060SS75000, Height=0.8mm, Manufacturer_Part_Number=150060SS75000, Mouser Price/Stock=https://www.mouser.co.uk/ProductDetail/Wurth-Elektronik/150060SS75000?qs=LlUlMxKIyB0oQaxwspeTEA%3D%3D
R1 R2 R3 R4: library part CMP-2000-03013-2, "RES Thick Film, 1MΩ, 1%, 0.1W, 100ppm/°C, 0603", Case Code (Imperial)=0603, Case Code (Metric)=1608, Max Operating Temperature=155°C, Max Power Dissipation=100mW, Min Operating Temperature=-55°C, Package Quantity=10, Resistance=3.3k, Temperature Coefficient=100ppm/°C, Tolerance=1%, Voltage Rating=75V, Case/Package=0603, Composition="Thick Film", Contact Plating=Tin, Depth=0.85mm, Features="Automotive AEC-Q200", Height=0.45mm, Lead Free="Lead Free", Length=1.55mm, Military Standard=Not, Mount="Surface Mount", Number of Pins=2, Number of Terminations=2, Packaging="Tape and Reel", Power Rating=100mW, Radiation Hardening=No, Termination=SMD/SMT, Voltage Rating (DC)=75V, Weight=7.1E-05oz, Width=0.85mm
R5: library part CMP-1012-00705-2, Manufacturer=Yageo, Resistance=52.3k, Part Number=RC0603FR-0752K3L
R6: library part CMP-1666-00005-4, "Chip Resistor, 10 KOhm, +/- 1%, 100 mW, -55 to 155 degC, 0603 (1608 Metric), RoHS, Tape and Reel", Manufacturer="Vishay Semiconductor", Max Operating Temperature="155 degC", Min Operating Temperature="-55 degC", Package Quantity=5000, Resistance=10k, Voltage Rating="75 V", ComponentLink1Description="Manufacturer URL", ComponentLink1URL=http://www.vishay.com/, ComponentLink2Description=Datasheet, ComponentLink2URL=https://datasheet.ciiva.com/11809/0900766b80d98afc-11809037.pdf, DatasheetVersion=06/2012, Height="0.45 mm", Length="1.55 mm", Mounting Technology="Surface Mount", PackageDescription="2-Pin Surface Mount Device, Body 1.575 x 0.85 mm", PackageReference=0603, Packaging="Tape and Reel", REACH SVHC=Unknown, RoHSCompliant=true
U1: library part CMP-1063-00173-1, "Industry First Low Capacitance ESD Protection Arrays with Backdrive Protection, 5-Pin SOT-23, Pb-Free, Tape and Reel", Manufacturer="On Semiconductor", C Max (pF)=1.5, Code_JEDEC=MO-178, ComponentLink1Description="Manufacturer URL", ComponentLink1URL=http://www.onsemi.com/, ComponentLink2Description=Datasheet, ComponentLink2URL=http://www.onsemi.com/pub_link/Collateral/CM1223-D.PDF, ComponentLink3Description="Package Specification", ComponentLink3URL=http://www.onsemi.com/pub_link/Collateral/527AH.PDF, DatasheetVersion="Rev. 6", Direction=Unidirectional, Mounting Technology="Surface Mount", Number of Lines=2, PackageDescription="5-Pin Small Outline Transistor, Body 2.9 x 1.6 mm, Pitch 0.95 mm", PackageReference=SOT23-5-527AH-01, PackageVersion="Rev. O, 12/2008", Packing="Tape and Reel", PartNumber=CM1223-02SO, PPK Max (W)=0.225, RoHS=Pb-Free
U2 U5 U8: "No Description Available", Mfr_Name="Texas Instruments", Copyright="Copyright (C) 2022 Ultra Librarian. All rights reserved.", Manufacturer_Part_Number=PDRV8243HRXYQ1, RefDes=RefDes, Type=DEV
U3: "MOSFET (P-Channel)", Manufacturer_Name=Nexperia, Mouser Part Number=771-BUK6Y24-40PX, Arrow Part Number=BUK6Y24-40PX, Arrow Price/Stock=https://www.arrow.com/en/products/buk6y24-40px/nexperia?region=nac, Datasheet Link=https://assets.nexperia.com/documents/data-sheet/BUK6Y24-40P.pdf, Height=1.2mm, Manufacturer_Part_Number=BUK6Y24-40PX, Mouser Price/Stock=https://www.mouser.co.uk/ProductDetail/Nexperia/BUK6Y24-40PX?qs=vmHwEFxEFR8tyd2WwTEwBg%3D%3D
U4 U7: "No Description Available", Mfr_Name="Maxim Integrated Products", Copyright="Copyright (C) 2022 Ultra Librarian. All rights reserved.", Manufacturer_Part_Number=MAX14930AASE+, RefDes=RefDes, Type=DEV
U6: library part STM32G441xB
U9: "Integrated Circuit", Manufacturer_Name=onsemi, Mouser Part Number=863-NCP164CSN330T1G, Arrow Part Number=NCP164CSN330T1G, Arrow Price/Stock=https://www.arrow.com/en/products/ncp164csn330t1g/on-semiconductor?region=nac, Datasheet Link=https://componentsearchengine.com/Datasheets/2/NCP164CSN330T1G.pdf, Height=1.1mm, Manufacturer_Part_Number=NCP164CSN330T1G, Mouser Price/Stock=https://www.mouser.co.uk/ProductDetail/onsemi/NCP164CSN330T1G?qs=xZ%2FP%252Ba9zWqbi%2FAyy5UtoRw%3D%3D
U10: "Integrated Circuit", Manufacturer_Name="Texas Instruments", Mouser Part Number=595-TPS62933DRLR, Arrow Part Number=TPS62933DRLR, Arrow Price/Stock=https://www.arrow.com/en/products/tps62933drlr/texas-instruments?region=nac, Datasheet Link=https://www.ti.com/lit/ds/symlink/tps62933.pdf?ts=1626073394234, Height=0.6mm, Manufacturer_Part_Number=TPS62933DRLR, Mouser Price/Stock=https://www.mouser.co.uk/ProductDetail/Texas-Instruments/TPS62933DRLR?qs=Rp5uXu7WBW9fv47wfQVntQ%3D%3D
U11: "Integrated Circuit", Manufacturer_Name="Maxim Integrated", Mouser Part Number=700-MAX12930EASA+, Datasheet Link=https://ms.componentsearchengine.com/Datasheets/1/MAX12930EASA+.pdf, Height=1.75mm, Manufacturer_Part_Number=MAX12930EASA+, Mouser Price/Stock=https://www.mouser.com/Search/Refine.aspx?Keyword=700-MAX12930EASA%2B

## Free pads (board coordinates)
  round 3 hole 3 unplated: hole(36,29) hole(36,71) hole(80,29) hole(80,71)

## Via types
v1: diameter 0.6, hole 0.3, Top Layer to Bottom Layer, tented both sides, 83 vias
v2: diameter 0.8, hole 0.5, Top Layer to Bottom Layer, tented both sides, 17 vias
v3: diameter 1, hole 0.6, Top Layer to Bottom Layer, tented both sides, 14 vias
v4: diameter 0.8, hole 0.5, Top Layer to Bottom Layer, tented bottom, 9 vias
v5: diameter 0.5, hole 0.2, Top Layer to Bottom Layer, tented both sides, 8 vias

## Nets (pads, with @x,y where several pads share a name; then routed paths per layer and width w, separated by ;. In a path a pad name is that pad's centre, name@x,y a point inside that pad or via, vN(x,y) a via of type N, cw(c..) or ccw(c..) an arc to the next point about the centre after c; other vN are vias at no path point)
+3V3: C5.1 C11.2 C12.2 C13.2 C15.1 C21.2 C28.2 J6.01 J11.2 J12.2 J13.2 U4.1 U6.1 U6.15 U6.17 U7.1 U9.5 U11.1 | length 25
  Top Layer w0.5: v1(39.367,64.819) 39.349,64.837 39.349,66.429 J6.01@39.451,66.531 ; C11.2@43.025,37.2 43.2,37.375 U6.1 ; v1(43.155,36.228) C11.2@43.155,37.108 ; U6.17 48.81,47.47 48.81,47.955 48.811,47.957 48.811,49.536 48.975,49.7 49.044,49.631 49.044,49.518 49.203,49.36 49.738,49.36 v1(49.757,49.341) ; U6.15 50.235,45.245 51.545,45.245 51.775,45.475 C12.2 v1@51.9,46.228 ; C28.2@50.4,61.8 U9.5@50.4,63.4 ; v1(54.974,38.805) 54.987,38.792 C21.2@55.803,38.792 ; U11.1@55.803,37.58 C21.2@55.803,38.792 ; C21.2@55.89,38.792 C21.2@55.803,38.792 ; v1(56.192,56.032) 56.211,56.051 57.04,56.051 57.064,56.075 57.064,54.5 57.047,54.484 U7.1 ; v1(56.585,70.9) 56.604,70.919 56.604,71.579 56.998,71.973 58.674,71.973 U4.1
  Bottom Layer w0.5: 38,35.5 42.5,35.5 43.128,36.128 v1@43.155,36.128
  other v1: 51.911,46.239 50,59.9 50.9,59.9 50.001,60.712 50.9,60.7
+5: C25.2 J1.1 J17.1 U1.5 U9.1 U9.3 | length 18.3
  Top Layer w0.5: J1.1 46.196,69.115 46.551,68.76 U1.5@46.551,67.076 ; U1.5 47.703,67.105 ; J17.1 46.46,62.117 47.703,63.361 47.703,67.105 ; U9.3 48.6,65.9 48.6,67.105 ; C25.2@50.4,67.105 48.6,67.105 ; U9.1 50.475,65.875 50.475,67.075 C25.2 ; 47.703,67.105 48.6,67.105
+5V: C6.1 C16.1 C22.1 C24.2 J14.2 J16.2 L1.2 R5.2 U4.10 U4.16 U7.10 U7.16 U11.8 | length 32
  Top Layer w0.5: U11.8 C22.1@60.715,38.875 ; C22.1 60.925,38.875 61.034,38.984 61.702,38.984 v1(61.722,39.003) ; v1(61.78,55.889) 61.786,55.894 62.694,55.894 C16.1@62.698,55.898 ; U7.10 62.494,46.847 63.356,46.847 63.545,46.658 v1(63.572,46.658) ; U7.16 62.678,54.484 62.698,54.503 C16.1@62.698,55.898 ; C16.1@62.698,55.902 C16.1@62.698,55.898 ; C16.1 C16.1@62.698,55.898 ; v1(62.994,64.349) 63.004,64.36 64.13,64.36 U4.10 ; U4.16 66.117,71.99 C6.1@66.117,71.829 ; C6.1 66.075,71.675 66.303,71.447 66.303,71.024 66.4,70.927 v1(66.4,70.9) ; v1(70.413,55.12) 70.4,55.133 70.4,60.758 71.7,62.058 v1(71.7,67.4)
  Bottom Layer w0.5: 62.4,46.658 v1(63.572,46.658) ; v1(62.994,64.349) 64.426,64.349 L1.2@64.825,63.951 ; v1(66.4,70.9) v1@66.427,70.9 ; R5.2@69.948,54.452 69.948,54.628 70.413,55.093 v1(70.413,55.12) ; C24.2@70.297,67.458 C24.2@70.5,67.458 ; C24.2@70.539,67.419 71.681,67.419 v1(71.7,67.4)
  Bottom Layer w0.9: J16.2 J16.2@52.7,28.207 ; 64.45,62.949 64.45,63.576 64.825,63.951 L1.2
ENC1_M1: J11.3 U6.25 | length 13.5
  Top Layer w0.3: J11.3 35.487,54.957 38.342,54.957 39.605,53.694 39.605,47.712 41.282,46.035 U6.25
ENC1_M2: J12.3 U6.27 | length 6.5
  Top Layer w0.3: J12.3 35.503,44.887 40.789,44.887 41.193,44.483 41.727,44.483 U6.27
ENC1_M3: J13.3 U6.29 | length 11.8
  Top Layer w0.3: J13.3 35.63,34.93 35.63,35.386 35.779,35.535 35.779,35.607 36.841,36.669 36.841,36.68 37.52,37.359 37.531,37.359 38.577,38.405 38.577,40.939 40.473,42.835 U6.29@41.828,42.835 ; J13.3@35.662,34.432 J13.3@35.662,34.802
ENC2_M1: J11.4 U6.26 | length 9.7
  Top Layer w0.3: 38,52.969 38,52.849 38.614,52.235 38.614,47.719 41.05,45.283 41.759,45.283 U6.26@41.807,45.235
ENC2_M2: J12.4 U6.28 | length 3.7
  Top Layer w0.3: J12.4@38.035,43.635 U6.28
ENC2_M3: J13.4 U6.30 | length 10.5
  Top Layer w0.3: J13.4 39.316,34.976 39.316,40.529 40.826,42.039 U6.30@41.779,42.039
GND: C5.2 C11.1 C12.1 C13.1 C14.2 C15.2 C21.1 C25.1 C28.1 J1.5 J1.S1 J1.S2 J1.S3 J1.S4 J1.S5 J1.S6 J6.03 J6.05 J6.09 J11.1 J12.1 J13.1 J17.3 LED1.1 U1.2 U4.2 U4.8 U6.14 U6.16 U6.32 U7.2 U7.8 U9.2 U11.4 | length 29.1
  Top Layer w0.5: v1(34.237,64.834) 34.244,64.841 J6.09@34.244,66.397 ; v1(36.767,64.811) 36.779,64.823 36.779,66.528 J6.05 ; J6.03@38.064,66.329 38.071,66.321 38.071,64.844 v1(38.081,64.834) ; v1(40.949,38.234) 40.962,38.221 40.962,37.621 C11.1@41.035,37.549 ; J1.S6@41.455,72.159 J1.S3@43.555,72.159 ; J1.S2@41.555,69.709 41.762,69.916 v1(41.762,70.689) ; v1(41.742,39.831) 41.758,39.847 41.758,40.412 U6.32@41.767,40.412 ; v1(43.409,66.161) 43.413,66.158 43.976,66.158 U1.2@43.976,66.105 ; v1(43.527,70.483) 43.527,70.456 43.546,70.437 J1.5@43.546,69.915 ; C14.2@45.371,35.415 v1(46.116,35.415) ; J1.S4@45.955,72.159 J1.S5@48.055,72.159 ; J1.S1@47.982,69.737 48.144,69.899 v1(48.144,70.689) ; v1(48.13,61.587) 48.137,61.593 48.793,61.593 C28.1 ; v1(49.178,44.447) 49.183,44.441 50.646,44.441 U6.14@50.651,44.436 ; v1(49.491,64.917) 49.495,64.922 49.495,66.173 U9.2@49.5,66.178 ; U6.16 50.228,46.039 50.228,46.612 v1(50.232,46.616) ; C25.1@50.538,68.462 v1(51.167,68.462) ; C13.1@50.987,49.783 51.067,49.703 51.067,49.553 51.253,49.367 51.796,49.367 v1(51.815,49.348) ; v1(51.9,48.327) 51.9,47.697 C12.1@51.909,47.688 ; LED1.1 52.452,35.903 52.452,36.701 v1(52.455,36.704) ; v1(54.237,33.689) U11.4@55.184,33.689 ; v1(54.762,70.886) 54.768,70.892 54.768,71.793 C5.2 ; v1(55.037,40.353) 55.056,40.372 55.122,40.372 55.579,40.829 C21.1@55.903,40.829 ; v1(55.995,53.216) 55.996,53.215 U7.2@57.026,53.215 ; v1(56.213,58.092) 56.23,58.108 56.828,58.108 C15.2@56.839,58.098 ; v1(56.706,44.984) 56.725,45.003 56.725,45.577 56.741,45.594 U7.8 ; v1(57.661,63.075) 57.674,63.088 58.678,63.088 U4.8 ; v1(57.669,70.699) 57.679,70.71 58.681,70.71 U4.2 ; U7.2@57.026,53.215 U7.2
IR_SENSOR: J17.2 U6.2 | length 20.2
  Top Layer w0.3: v1(43.992,40.04) 43.996,40.036 43.996,39.014 U6.2
  Bottom Layer w0.3: v1(43.992,40.04) 47.619,43.666 47.619,55.719 J17.2
LED: R3.2 U6.5 | length 4
  Top Layer w0.3: U6.5 46.4,37.71 47.56,36.55 47.56,35.69 R3.2@47.649,35.6 ; U6.5@46.419,38.991 U6.5@46.448,38.962
M1_DIR: U4.3 U6.20 | length 28.2
  Top Layer w0.2: U6.20 46.4,51.846 47.974,53.42 49.472,53.42 52.502,56.45 52.502,63.725 58.227,69.45 U4.3
M1_DIR_DRIVER: U2.10 U4.14 | length 18.6
  Top Layer w0.3: U4.14@64.127,69.45 64.01,69.333 63.454,69.333 63.06,68.939 63.06,67.768 63.265,67.563 65.016,67.563 66.162,68.709 72.358,68.709 74.672,66.396 U2.10
M1_PWM: U4.4 U6.19 | length 26.4
  Top Layer w0.2: U6.19@47.187,47.473 47.187,50.953 48.599,52.365 49.668,52.365 53.531,56.229 53.531,63.485 58.227,68.18 U4.4
M1_PWM_DRIVER: U2.9 U4.13 | length 16.9
  Top Layer w0.3: U4.13@63.734,68.179 64.603,68.179 64.721,68.297 64.721,68.348 65.963,69.59 72.87,69.59 75.172,67.289 U2.9
M2_DIR: U4.6 U6.13 | length 26.7
  Top Layer w0.2: U6.13 51.801,43.635 53.005,44.839 53.005,52.538 55.498,55.031 55.498,62.865 58.06,65.427 58.06,65.473 58.227,65.64 U4.6
M2_DIR_DRIVER: U4.11 U5.10 | length 21
  Top Layer w0.3: U4.11 64.257,65.523 64.751,65.523 65.283,64.991 65.283,57.463 71.328,51.418 74.65,51.418 74.675,51.393 U5.10
M2_PWM: U4.5 U6.18 | length 24.9
  Top Layer w0.2: U6.18 48,50.5 48.7,51.2 50.059,51.2 54.486,55.627 54.486,63.169 58.227,66.91 U4.5
M2_PWM_DRIVER: U4.12 U5.9 | length 22.5
  Top Layer w0.3: U4.12 64.162,66.888 65.527,66.888 66.566,65.849 66.566,57.69 72.066,52.191 74.687,52.191 75.15,51.727 75.15,51.556 75.15,51.307 U5.9
M3_DIR: U6.7 U7.4 | length 20.7
  Top Layer w0.2: U6.7 48,38.547 48.562,37.985 50.076,37.985 55.233,43.143 55.233,47.806 56.127,48.7 57.941,48.7 58.058,48.818 58.058,49.795 57.882,49.97 57.164,49.97 57.027,50.107 U7.4
M3_DIR_DRIVER: U7.13 U8.10 | length 17.8
  Top Layer w0.3: U7.13 62.559,50.591 65.181,50.591 74.672,41.1 U8.10
M3_PWM: U6.12 U7.3 | length 13.4
  Top Layer w0.2: U6.12 50.282,42.892 52.249,42.892 53.639,44.283 53.639,49.065 56.351,51.777 56.861,51.777 U7.3
M3_PWM_DRIVER: U7.14 U8.9 | length 19.5
  Top Layer w0.3: U7.14@62.123,51.955 64.859,51.955 75.172,41.642 U8.9
MCU_SLEEP: U6.6 U7.6 | length 18.6
  Top Layer w0.2: U6.6 47.204,39.006 47.204,38.152 48.339,37.017 50.328,37.017 55.977,42.666 55.977,47.547 56.396,47.966 56.563,48.134 U7.6
NetC23_1: C23.1 L1.1 U10.5
NetC23_2: C23.2 U10.6 | length 3.4
  Bottom Layer w0.3: C23.2 64.19,54.243 64.593,53.84 66.372,53.84 66.548,54.016 U10.6
NetC29_1: C29.1 U10.7 | length 2.3
  Bottom Layer w0.3: U10.7 67.048,54.879 67.048,55.086 67.374,55.412 67.713,55.412 68.144,55.843 68.144,55.866 68.45,56.172 C29.1
NetJ2_2: J2.2 U2.7 | length 6.8
  Top Layer w0.5: U2.7 76.947,64.405 77.542,65 ; 77.198,65 J2.2@81.656,65
NetJ3_2: J3.2 U3.5 U3.6
NetJ4_2: J4.2 U2.5 | length 3.6
  Top Layer w0.5: U2.5 76.947,59.461 78.369,58.038
NetJ7_2: J7.2 U5.7 | length 7
  Top Layer w0.5: U5.7 76.95,52.52 77.43,53 ; 77.086,53 J7.2@81.656,53
NetJ8_2: J8.2 U5.5 | length 6.1
  Top Layer w0.5: 76.95,47.293 U5.5 ; 77.243,47 J8.2 J8.2@81.656,47
NetJ9_2: J9.2 U8.7 | length 6.2
  Top Layer w0.5: U8.7 76.947,40.707 ; 77.24,41 J9.2 J9.2@81.656,41
NetJ10_2: J10.2 U8.5 | length 7.4
  Top Layer w0.5: U8.5 76.947,35.039 77.26,34.726 78.868,34.726 79.142,35 ; 78.798,35 J10.2@81.656,35
NetLED1_2: LED1.2 R3.1 | length 1.8
  Top Layer w0.3: R3.1 LED1.2
NetR1_2: R1.2 U2.2 | length 3
  Top Layer w0.3: R1.2@72.557,60.066 74.286,60.066 74.402,59.95 74.942,59.95 75.147,60.155 U2.2@75.147,60.45
NetR2_2: R2.2 U5.2 | length 3.2
  Top Layer w0.3: R2.2@72.491,47.718 74.831,47.718 75.175,48.063 U5.2
NetR4_2: R4.2 U8.2 | length 3.4
  Top Layer w0.3: R4.2 74.559,35.601 75.172,36.213 U8.2
NetR5_1: R5.1 R6.2 U10.8 | length 2.4
  Bottom Layer w0.3: U10.8 67.548,54.616 67.558,54.616 68.024,54.151 68.448,54.151 68.598,54.301 R5.1 ; R5.1@68.523,54.339 68.523,53.784 R6.2@68.8,53.506
NRST: C14.1 J6.10 U6.4 | length 31.9
  Top Layer w0.254: J6.10@34.494,62.227 J6.10 34.251,61.445 34.494,61.202 34.503,61.202 34.876,60.829 34.877,60.827 ccw(c35.056,61.008) 34.901,60.807 34.963,60.76 34.984,60.756 cw(c34.941,60.506) 35.016,60.748 36.027,60.748 36.038,60.76 36.211,60.76 cw(c36.211,60.506) 36.286,60.748 37.807,60.748 40.4,58.155 40.4,53.2 40.394,53.182 40.394,48.812 40.468,48.738 45.6,43.606 U6.4 C14.1@45.6,37.258
PGND: C1.1 C2.1 C3.1 C4.1 C6.2 C7.1 C8.1 C9.1 C10.1 C16.2 C17.1 C18.1 C19.1 C20.1 C22.2 C24.1 C26.2 C27.2 C29.2 J5.2 J14.3 J15.1 J16.3 R1.1 R2.1 R4.1 R6.1 U2.6 U2.8 U2.11 U2.14 U3.4 U4.9 U4.15 U5.6 U5.8 U5.11 U5.14 U7.9 U7.15 U8.6 U8.8 U8.11 U8.14 U10.4 U11.5 | length 19.5
  Top Layer w0.254: v1(73.928,60.773) 73.994,60.84 U2.14@73.994,61.248 ; v1(73.969,63.351) 74.036,63.285 74.036,62.752 74.038,62.75 U2.11 ; v1(73.982,36.828) 74.048,36.894 74.048,37.281 74.05,37.283 U8.14 ; v1(75.033,38.221) 75.67,38.857 U8.8@75.67,39.26 ; v1(75.371,62.518) 75.371,62.611 75.67,62.91 U2.8@75.67,63.227 ; v1(75.394,50.42) 75.394,50.514 75.673,50.793 U5.8@75.673,51.109
  Top Layer w0.3: v1(73.408,50.591) 73.428,50.612 U5.11@74,50.612 ; v1(73.97,48.671) 74.028,48.729 74.028,49.108 74.053,49.133 U5.14 ; v1(73.988,39.199) 74.046,39.142 74.046,38.808 74.071,38.783 U8.11
  Top Layer w0.5: U11.5 61.152,33.695 61.227,33.62 61.227,33.066 61.257,33.036 v1(61.257,33.009) ; C22.2@60.944,40.959 v1(61.696,40.959) ; v1(61.968,44.986) 61.968,45.013 61.996,45.041 61.996,45.577 62.013,45.594 U7.9 ; U7.15 62.489,53.202 63.656,53.202 v1(63.668,53.19) ; C16.2 62.717,57.967 62.717,58.707 v1(62.734,58.724) ; v1(63.049,63.165) 63.076,63.165 63.124,63.117 64.124,63.117 U4.9 ; U4.15 64.16,70.701 v1(65.159,70.701) ; v1(68.089,72.706) 68.107,72.688 68.107,71.818 C6.2 ; U3.4 v1(69.594,38.272) ; v1(71.721,49.254) 71.739,49.236 72.507,49.236 R2.1 ; v1(72.235,37.843) 72.254,37.824 72.254,37.226 72.379,37.101 R4.1 ; v1(72.249,57.85) 72.249,57.877 72.292,57.92 72.292,58.375 72.316,58.399 R1.1@72.643,58.399
  Bottom Layer w0.5: R6.1@69.055,51.955 69.126,51.955 69.182,51.9 69.182,51.348 v1(69.163,51.329) ; v1(69.596,56.949) 69.596,56.922 69.698,56.82 69.698,56.378 C29.2@70.028,56.378
  other v1: 71.6,70.3 72.4,70.3 71.6,71.1 72.4,71.1
  other v2: 78.3,36.7 78.292,38.001 78.3,39.3 78.3,48.6 78.292,49.901 78.3,51.2 78.3,60.7 78.292,62.001 78.3,63.3
  other v3: 78.25,32.5 79.75,32.5 79.989,37.338 79.983,38.709 79.977,43.291 80,44.5 80.015,49.337 80.006,50.643 79.973,55.361 80,56.5 79.976,61.343 79.988,62.697 78.75,67.5 80,67.5
  other v4: 71.9,27.9 72.9,27.9 73.9,27.9 71.9,28.9 72.9,28.9 73.9,28.9 71.9,29.9 72.9,29.9 73.9,29.9
  other v5: 63.872,48.251 63.872,48.966 63.819,49.919 63.769,51.273 65.1,53
SERVO2_PWM: U6.11 U11.3 | length 11
  Top Layer w0.2: U6.11 U6.11 51.238,42.034 v1(51.239,42.033) ; v1(54.224,34.944) 55.27,34.944 U11.3
  Bottom Layer w0.2: v1(51.239,42.033) 51.239,36.995 53.289,34.944 v1(54.224,34.944)
SERVO2_PWM_OUT: J16.1 U11.6 | length 10.2
  Top Layer w0.3: J16.1 56.464,28 59.591,31.127 59.591,34.279 60.277,34.965 U11.6
SERVO_PWM: U6.31 U11.2 | length 22.9
  Top Layer w0.2: U6.31 41.288,41.235 40.106,40.054 40.106,35.772 41.478,34.4 52.595,34.4 54.334,36.139 U11.2@55.293,36.139
SERVO_PWM_OUT: J14.1 U11.7 | length 9.1
  Top Layer w0.3: U11.7@61.155,36.139 62.293,35.001 62.293,29.547 J14.1
SLEEP_DRIVER: U2.3 U5.3 U7.11 U8.3 | length 50.7
  Top Layer w0.2: U7.11 62.644,47.967 63.269,47.967 64.21,47.026 67.416,47.026 v1(68.423,46.02) 68.423,45.957 71.363,43.017 71.363,35.413 71.85,34.926 74.68,34.926 75.66,35.905 U8.3@75.66,36.622 ; v1(68.855,49.065) 68.855,49.047 71.227,46.675 74.282,46.675 75.65,48.043 75.65,48.458 U5.3 ; v1(71,54.5) 73.359,56.859 73.359,57.766 75.647,60.053 75.647,60.575 U2.3
  Bottom Layer w0.2: v1(68.423,46.02) 68.875,46.472 68.875,49.045 v1(68.855,49.065) ; v1@68.855,49.082 70.257,50.484 70.257,51.966 70.566,52.275 70.566,54.174 70.892,54.5 v1(71,54.5)
SWCLK: J6.04 U6.24 | length 17.3
  Top Layer w0.3: J6.04 38.281,62.25 38.281,61.193 41.5,57.974 41.5,49.133 42.749,47.884 43.085,47.884 43.173,47.796 U6.24@43.173,47.46
SWDIO: J6.02 U6.23 | length 17
  Top Layer w0.3: J6.02 39.331,61.445 39.551,61.225 39.62,61.225 42.5,58.345 42.5,49.705 43.952,48.253 43.952,47.508 U6.23
THRW_PWM: U6.8 U7.5 | length 15.5
  Top Layer w0.2: U6.8 48.8,39.199 48.962,39.36 50.413,39.36 54.401,43.348 54.401,48.173 55.586,49.358 56.982,49.358 U7.5
THRW_PWM_OUT: J15.2 U7.12 | length 35.4
  Top Layer w0.3: J15.2@43.9,30.8 45.037,30.8 46.03,29.807 46.99,29.807 47.983,30.8 57.415,30.8 59.017,32.403 59.017,41.343 61.221,43.546 61.221,48.837 61.672,49.287 62.36,49.287 U7.12
USB_D_N: J1.2 U1.4 U6.21 | length 23.3
  Top Layer w0.15: J1.2 45.421,69.365 45.421,68.827 45.396,68.802 45.396,67.317 45.396,66.095 46.062,65.43 46.146,65.43 46.287,65.29 46.287,65.205 U1.4 46.371,65.205 46.146,64.98 46.146,64.905 45.372,64.131 45.372,48.198 45.6,47.97 U6.21
USB_D_P: J1.3 U1.3 U6.22 | length 24.3
  Top Layer w0.15: U6.22 44.8,47.976 45.022,48.198 45.022,64.179 44.296,64.905 44.296,64.98 44.071,65.205 U1.3 44.154,65.205 44.154,65.288 44.296,65.43 44.379,65.43 45.046,66.097 ; J1.3 45.021,69.365 45.021,68.827 45.046,68.802 45.046,67.172 ; 45.046,66.097 45.046,67.172 ; 45.046,66.097 45.046,67.172
VCC: C1.2 C2.2 C3.2 C4.2 C7.2 C8.2 C9.2 C10.2 C17.2 C18.2 C19.2 C20.2 C26.1 C27.1 U2.4 U3.1 U3.2 U3.3 U5.4 U8.4 U10.3 | length 16.2
  Top Layer w0.3: v1(76.105,64.16) 76.163,64.103 76.163,62.084 U2.4 76.23,61.983 v5(76.184,61.983) ; v1(76.107,52.044) 76.164,51.986 76.164,49.968 U5.4 76.198,49.831 76.198,47.668 v1(76.146,47.616) ; v1(76.117,40.185) 76.175,40.127 76.175,38.105 U8.4 76.195,37.981 76.195,35.516 v1(76.143,35.464) ; v1(76.143,59.625) 76.195,59.677 76.195,61.928 U2.4@76.184,61.938 ; v5(76.197,49.833) U5.4@76.199,49.831
  Bottom Layer w0.3: U10.3 66.548,52.552 67.002,52.098 67.002,50.994 C26.1@67.035,50.961
  other v2: 69.4,32.2 70.6,32.2 71.7,32.2 72.8,32.2 69.4,33.3 70.6,33.3 71.7,33.3 72.8,33.3
  other v5: 76.198,38.033
pads on no net: J1.4 J6.06 J6.07 J6.08 J11. J12. J13. J15. J15.3 J15.4 J17. J17.4 U1.1 U2.1 U2.12 U2.13 U4.7 U5.1 U5.12 U5.13 U6. U6.3 U6.9 U7.7 U8.1 U8.12 U8.13 U9.4 U10.1 U10.2

## Polygon pours and split planes (outlines as drawn)
NetJ3_2 on Top Layer "NETJ3_2_L01_P000" (solid, pour order 0): 65.89,27.279 65.2,29.6 62.897,32.57 62.897,38.472 68.51,38.472 68.5,31.5 69.5,30.4 69.5,27.279
+3V3 on Top Layer "+3V3_L01_P021" (solid, pour order 21): 51.3,64 51.3,59.5 49.6,59.5 49.6,64
VCC on Top Layer "VCC_L01_P010" (solid, pour order 10): 68.894,31.622 68.894,36.922 70.994,36.922 70.994,33.966 73.341,33.969 73.337,31.622 70.994,31.622
NetJ2_2 on Top Layer "NETJ2_2_L01_P003" (solid, pour order 3): 80.8,66.5 76.7,66.5 76.7,64.038 80.8,64.038
NetJ4_2 on Top Layer "NETJ4_2_L01_P004" (solid, pour order 4): 80.8,57.5 76.696,57.5 76.696,59.9 80.8,59.9
NetJ7_2 on Top Layer "NETJ7_2_L01_P005" (solid, pour order 5): 80.8,54.5 76.7,54.5 76.7,52 80.8,52
NetJ8_2 on Top Layer "NETJ8_2_L01_P006" (solid, pour order 6): 80.8,45.5 76.7,45.5 76.7,47.8 80.8,47.8
NetJ9_2 on Top Layer "NETJ9_2_L01_P007" (solid, pour order 7): 80.8,42.5 76.7,42.5 76.7,40.2 80.8,40.2
NetJ10_2 on Top Layer "NETJ10_2_L01_P008" (solid, pour order 8): 80.8,33.5 76.7,33.5 76.7,35.9 80.8,35.9
+3V3 on Bottom Layer "+3V3_L04_P020" (solid, pour order 20): 33,74 59.598,74 59.598,62.552 58.2,59.6 58.2,49.391 58.2,46.1 57.1,44.1 56.962,33.141 56.763,32.952 41.6,32.9 39.5,32.2 33,32.2
PGND on Bottom Layer "PGND_L04_P032" (solid, pour order 32): 69.2,69.8 69.2,71.6 72.8,71.6 72.8,69.8
VCC on Bottom Layer "VCC_L04_P009" (solid, pour order 9): 65.934,31.7 77.3,31.7 77.3,68.2 72.61,68.2 70.765,50.899 70.37,48.37 69.276,45.469 68.771,45.1 68.225,45.252 67.904,45.629 67.776,46.215 67.949,50.085 67.966,51.76 66.75,52.606 66.75,53.315 66.4,53.315 66.4,52.556 66.15,51.884 65.786,47.422 65.574,47.019 64.232,45.629 64.228,40.152 64.232,33.657 64.228,33.653
+5V on Bottom Layer "+5V_L04_P031" (solid, pour order 31): 62.859,58.593 63.2,59.1 63.215,60.785 63.298,60.94 65.015,62.585 70.4,62.6 71.186,65.117 71.2,69.6 68.3,69.6 67.2,70.7 67.2,74 62,74 62,62 60.1,59.5 60,43 58.7,41.43 58.647,32.664 57.613,31.675 51.4,31.686 51.4,26 62.683,26
PGND on Bottom Layer "PGND_L04_P030" (solid, pour order 30): 66.2,53.3 66.2,52.6 65.7,52.1 65.7,50.1 65.5,49.9 65.5,47.73 65.5,47.729 65.17,47.399 63.323,47.4 63.323,51.88 64.743,53.3 65.9,53.3
NetC23_1 on Bottom Layer "NETC23_1_L04_P024" (solid, pour order 24): 69.77,60.728 69.77,60.439 69.77,58.825 66.3,55.606 66.3,54.354 65.651,54.354 64.649,55.356 63.341,55.356 63.341,58.197 63.9,58.756 63.9,60.728
PGND on Bottom Layer "PGND_L04_P013" (solid, pour order 13): 77.6,68.25 82.5,68.25 82.5,31.808 77.6,31.808
GND on Layer 1 "GND_L02_P016" (solid, remove dead copper, pour order 16): 33,74 59.669,74 59.669,62.5 58.214,59.657 58.214,46.097 57.099,44.105 56.962,33.141 56.708,32.9 41.601,32.9 39.498,32.2 33,32.2
PGND on Layer 1 "PGND_L02_P017" (solid, remove dead copper, pour order 17): 83,74 83,26 33,26 33,31.1 40.7,31.1 42.242,31.717 57.619,31.679 58.646,32.665 58.646,41.406 60,43.013 60.081,59.487 61.952,61.963 61.952,74
GND on Layer 2 "GND_L03_P025" (solid, remove dead copper, pour order 25): 33,74 59.669,74 59.669,62.5 58.214,59.732 58.214,46.097 57.099,44.105 56.962,33.141 56.708,32.9 41.597,32.9 39.5,32.197 33,32.197
PGND on Layer 2 "PGND_L03_P026" (solid, remove dead copper, pour order 26): 83,74 83,26 33,26 33,31.1 40.75,31.1 42.291,31.716 57.618,31.678 58.646,32.665 58.646,41.406 60,43.013 60.082,59.519 61.952,61.995 61.952,74

## Silkscreen, mask and mechanical layers (free items; w line width, h text height)
Top Overlay:
  text "M1" at 79.487,61.238 h1.52
  text "M1" at 40.054,56.746 h1.52 r270
  text "IR" at 44.346,54.854 h1.52 r90
  text "M2" at 33.654,49.854 h1.52
  text "M2" at 79.514,49.254 h1.52
  text "M3" at 33.654,39.754 h1.52
  text "M3" at 79.38,37.229 h1.52
  text "+" at 67.354,30.8 h1.52
  text "-" at 72.354,30.692 h1.52
  text "SERV2" at 49.454,30.054 h1.52
  text "SERV" at 58.454,30.054 h1.52
  text "THR" at 39.746,26.754 h1.52 r90
Bottom Overlay:
  text "Competitive Robotics 2022" at 54.938,69.046 h1.52 r90
  text "Project in" at 51.938,59.046 h1.52 r90
  text "GibiBot" at 42.646,56.346 h1.52 r90

## Text inside footprints (layer, text, board x,y; h text height)
J1: Top 3D Body "PCB END" at 40.146,73.465 h0.41 r180
U4: Top 3D Body "*" at 59.485,71.152 h1.27; Top Overlay "*" at 57.963,72.51 h1.27
U7: Top 3D Body "*" at 57.822,53.646 h1.27; Top Overlay "*" at 55.2,53.8 h1.27